# EAGLE board SHTC3 Breakout-Panel (EAGLE 9.5.2), part 1 of 2
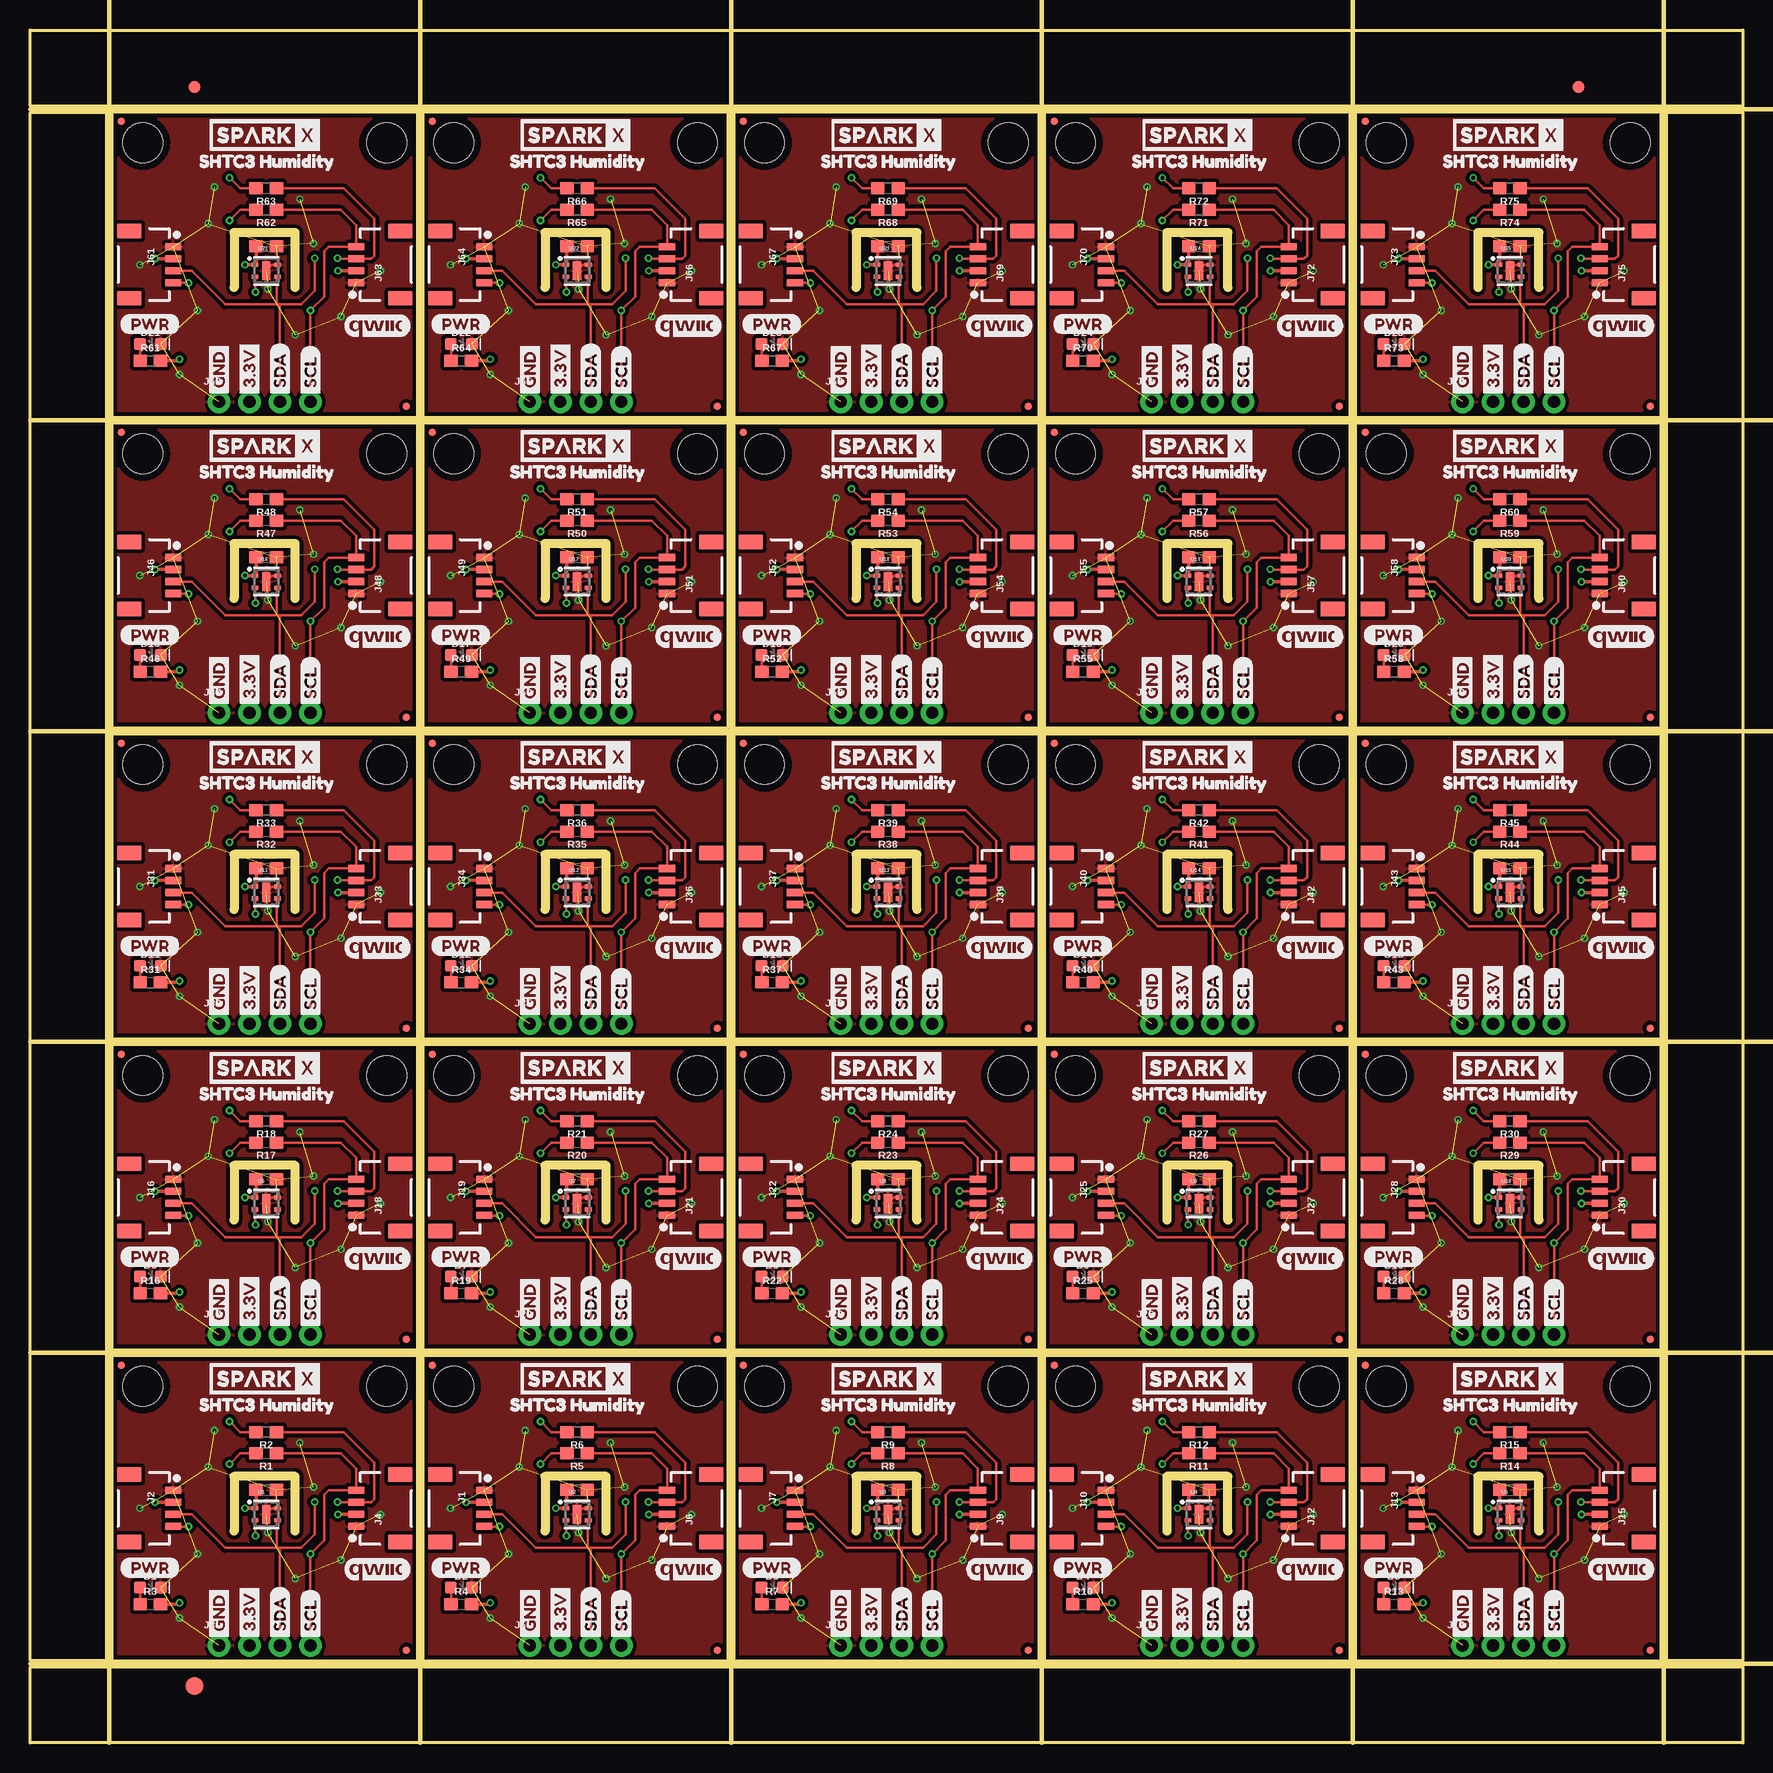
[diagram p0: board, top side]
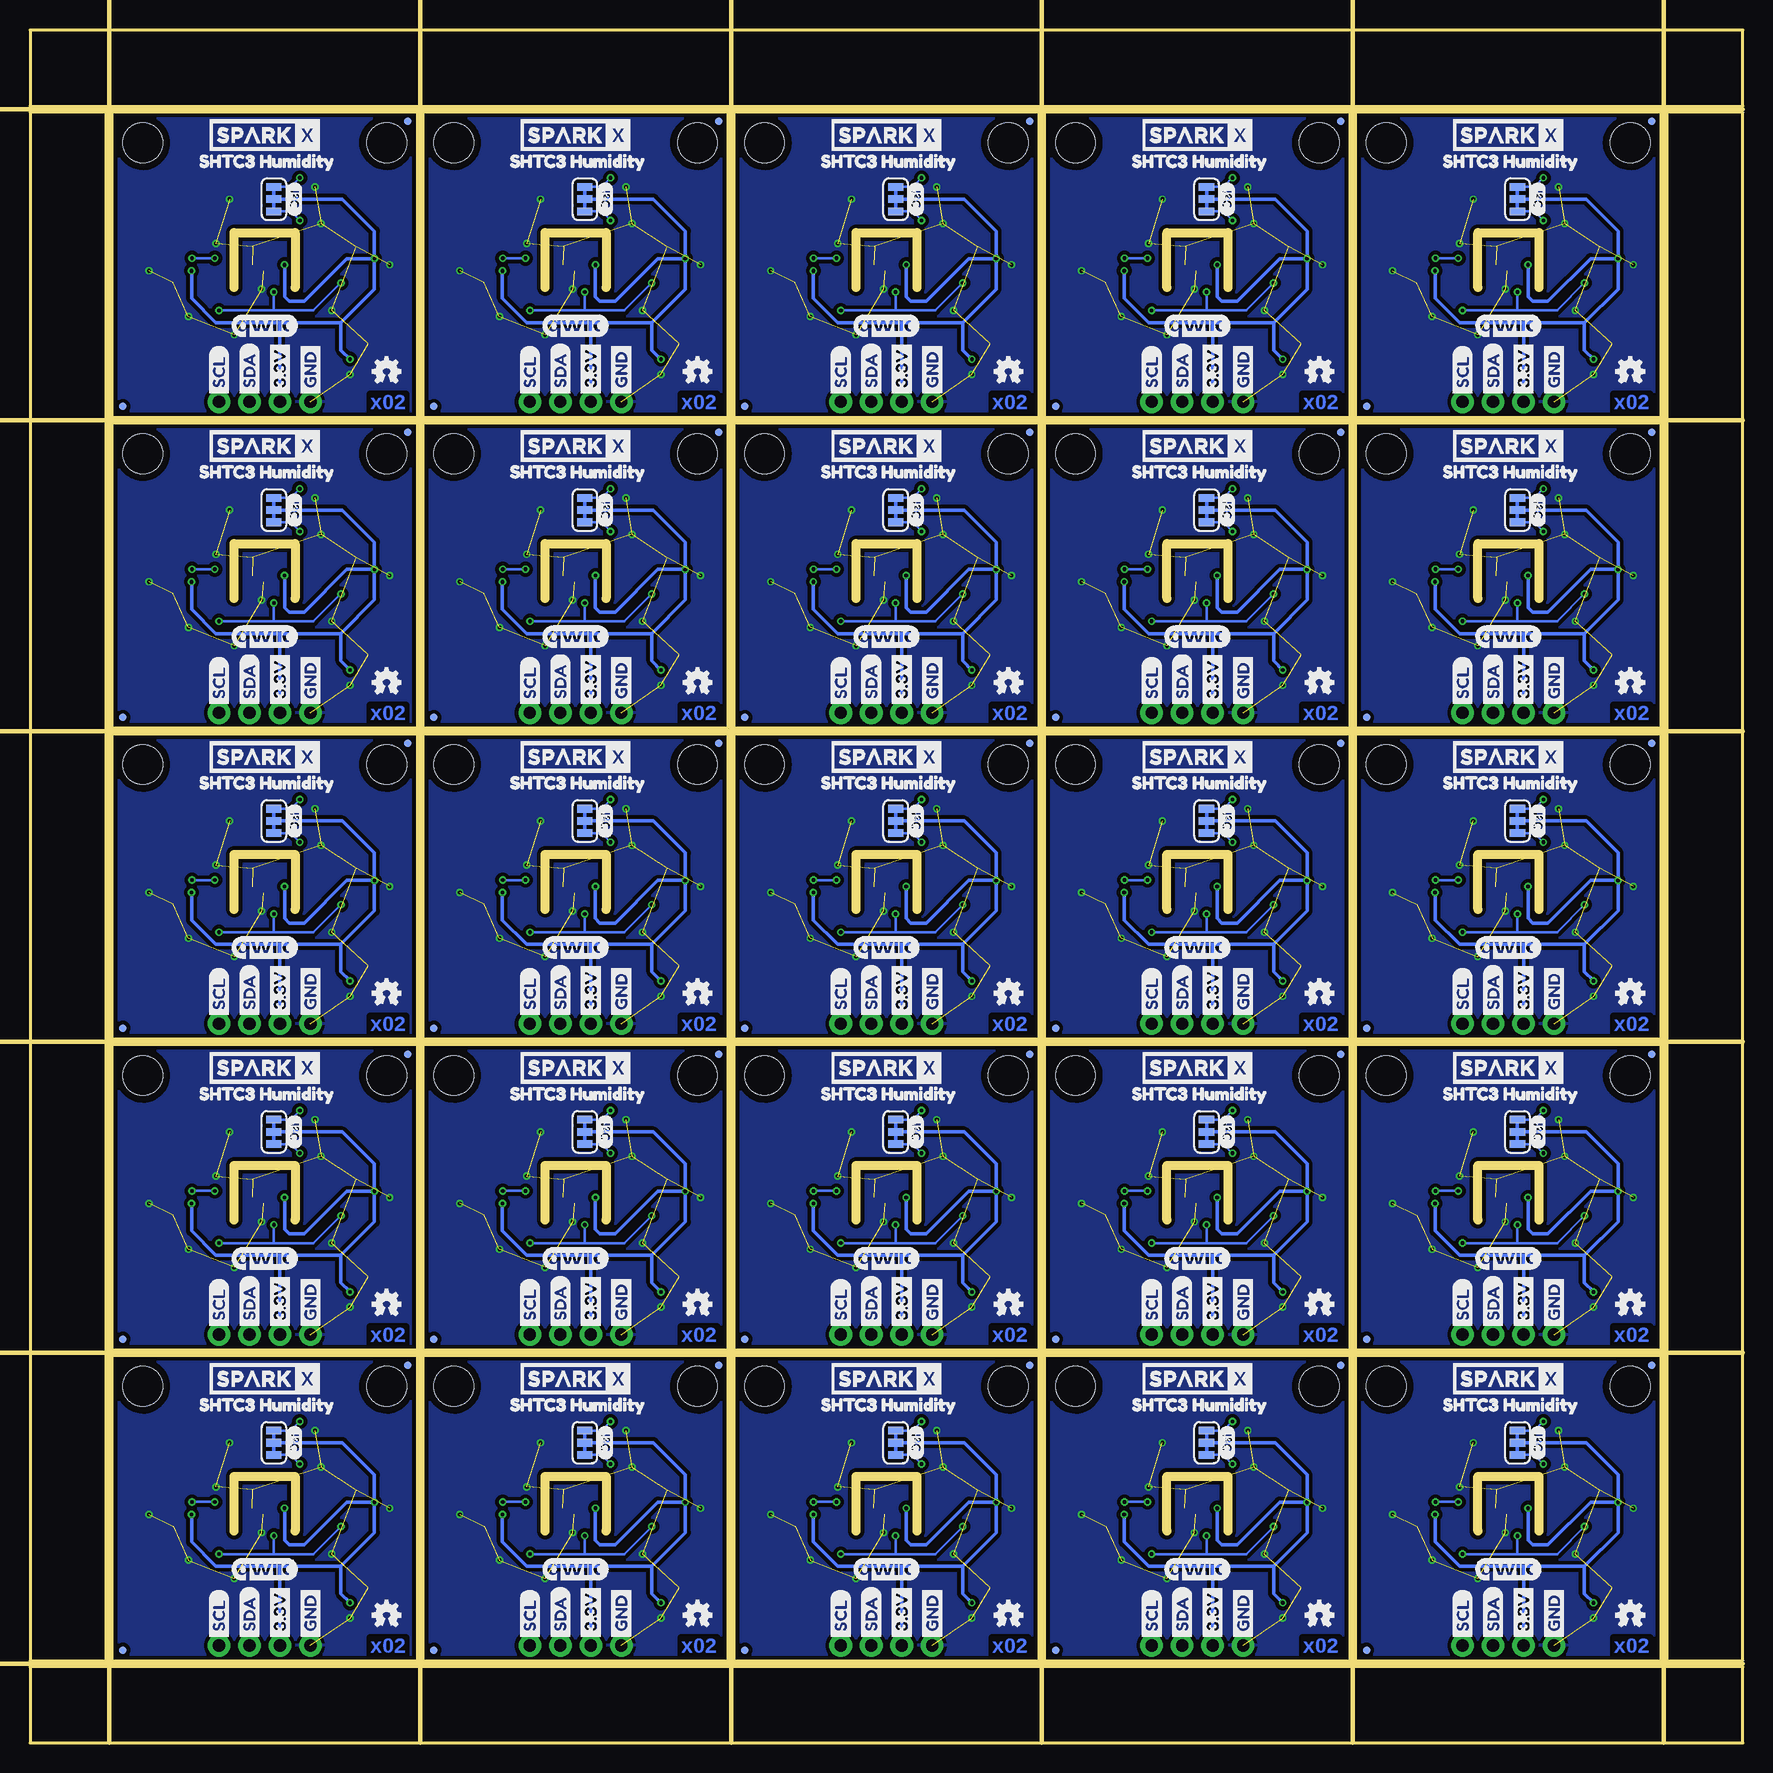
[diagram p1: board, bottom side, seen from below]

Size 142.75 x 142.75 mm. Coordinates in mm from the lower left corner, seen from the top.
Outline: 6.86,6.86 6.86,32.26 32.26,32.26 32.26,6.86 6.86,6.86
Outline: 32.77,6.86 32.77,32.26 58.17,32.26 58.17,6.86 32.77,6.86
Outline: 58.67,6.86 58.67,32.26 84.07,32.26 84.07,6.86 58.67,6.86
Outline: 84.58,6.86 84.58,32.26 109.98,32.26 109.98,6.86 84.58,6.86
Outline: 110.49,6.86 110.49,32.26 135.89,32.26 135.89,6.86 110.49,6.86
Outline: 6.86,32.77 6.86,58.17 32.26,58.17 32.26,32.77 6.86,32.77
Outline: 32.77,32.77 32.77,58.17 58.17,58.17 58.17,32.77 32.77,32.77
Outline: 58.67,32.77 58.67,58.17 84.07,58.17 84.07,32.77 58.67,32.77
Outline: 84.58,32.77 84.58,58.17 109.98,58.17 109.98,32.77 84.58,32.77
Outline: 110.49,32.77 110.49,58.17 135.89,58.17 135.89,32.77 110.49,32.77
Outline: 6.86,58.67 6.86,84.07 32.26,84.07 32.26,58.67 6.86,58.67
Outline: 32.77,58.67 32.77,84.07 58.17,84.07 58.17,58.67 32.77,58.67
Outline: 58.67,58.67 58.67,84.07 84.07,84.07 84.07,58.67 58.67,58.67
Outline: 84.58,58.67 84.58,84.07 109.98,84.07 109.98,58.67 84.58,58.67
Outline: 110.49,58.67 110.49,84.07 135.89,84.07 135.89,58.67 110.49,58.67
Outline: 6.86,84.58 6.86,109.98 32.26,109.98 32.26,84.58 6.86,84.58
Outline: 32.77,84.58 32.77,109.98 58.17,109.98 58.17,84.58 32.77,84.58
Outline: 58.67,84.58 58.67,109.98 84.07,109.98 84.07,84.58 58.67,84.58
Outline: 84.58,84.58 84.58,109.98 109.98,109.98 109.98,84.58 84.58,84.58
Outline: 110.49,84.58 110.49,109.98 135.89,109.98 135.89,84.58 110.49,84.58
Outline: 6.86,110.49 6.86,135.89 32.26,135.89 32.26,110.49 6.86,110.49
Outline: 32.77,110.49 32.77,135.89 58.17,135.89 58.17,110.49 32.77,110.49
Outline: 58.67,110.49 58.67,135.89 84.07,135.89 84.07,110.49 58.67,110.49
Outline: 84.58,110.49 84.58,135.89 109.98,135.89 109.98,110.49 84.58,110.49
Outline: 110.49,110.49 110.49,135.89 135.89,135.89 135.89,110.49 110.49,110.49
Outline: 0,6.35 142.75,6.35 142.75,0 0,0 0,6.35
Outline: 136.4,135.89 142.75,135.89 142.75,6.86 136.4,6.86 136.4,135.89
Outline: 0,142.75 142.75,142.75 142.75,136.4 0,136.4 0,142.75
Outline: 0,135.89 6.35,135.89 6.35,6.86 0,6.86 0,135.89
Copper layers (1*16): Top 0.035mm / dielectric 1.5mm / Bottom 0.035mm
Design rules "SparkFun-2-layer-PCBWay-LIMIT": minimum track width 6mil, minimum drill 0.3mm, track to track 6mil, track to pad 6mil, pad to pad 6mil, via to via 6mil, smd to smd 6mil, copper to edge 6mil, drill to drill 6mil, minimum pad ring 6mil, minimum via ring 6mil, stop-mask expansion 4mil, vias tented up to drill 25mil, thermal gap 10mil
tRestrict: 75 lines
bRestrict: 75 lines
Milling: 87 lines

## Footprints (pad centres in the part's own frame; a part is rotated, then mirrored left to right if it is on the bottom)
0603 = smd 1.1 x 1: 1 -0.85,0; 2 0.85,0
LED-0603 = smd 1 x 1: A -0.877,0; C 0.877,0
FIDUCIAL-1X2 = smd 1 x 1: 1 0,0
FIDUCIAL-1.5X3 = smd 1.5 x 1.5: 1 0,0
1X04_1MM_RA = smd 0.6 x 1.35: 1 -1.5,0; 2 -0.5,0; 3 0.5,0; 4 1.5,0 | smd 1.2 x 2: NC1 2.8,-3.675; NC2 -2.8,-3.675
1X04_NO_SILK = drill 1.016 pad 1.88: 1 0,0; 2 2.54,0; 3 5.08,0; 4 7.62,0
MICRO-FIDUCIAL = smd 0.635 x 0.635: 1 0,0
STAND-OFF = hole 3.302: 0,0
SMT-JUMPER_3_2-NC_TRACE_SILK = smd 0.635 x 1.27: 1 -1.016,0; 2 0,0; 3 1.016,0
SHTC3 = smd 0.55 x 0.35: 1 -0.925,0.5; 2 -0.925,-0.5; 3 0.925,-0.5; 4 0.925,0.5 | smd 0.7 x 1.6: 5 0,0

## Placement (x,y rotation side)
C1  0.1uF  [0603]  19.68,21.08 0 top
C2  0.1uF  [0603]  45.59,21.08 0 top
C3  0.1uF  [0603]  71.5,21.08 0 top
C4  0.1uF  [0603]  97.41,21.08 0 top
C5  0.1uF  [0603]  123.32,21.08 0 top
C6  0.1uF  [0603]  19.68,46.99 0 top
C7  0.1uF  [0603]  45.59,46.99 0 top
C8  0.1uF  [0603]  71.5,46.99 0 top
C9  0.1uF  [0603]  97.41,46.99 0 top
C10  0.1uF  [0603]  123.32,46.99 0 top
C11  0.1uF  [0603]  19.68,72.9 0 top
C12  0.1uF  [0603]  45.59,72.9 0 top
C13  0.1uF  [0603]  71.5,72.9 0 top
C14  0.1uF  [0603]  97.41,72.9 0 top
C15  0.1uF  [0603]  123.32,72.9 0 top
C16  0.1uF  [0603]  19.68,98.81 0 top
C17  0.1uF  [0603]  45.59,98.81 0 top
C18  0.1uF  [0603]  71.5,98.81 0 top
C19  0.1uF  [0603]  97.41,98.81 0 top
C20  0.1uF  [0603]  123.32,98.81 0 top
C21  0.1uF  [0603]  19.68,124.71 0 top
C22  0.1uF  [0603]  45.59,124.71 0 top
C23  0.1uF  [0603]  71.5,124.71 0 top
C24  0.1uF  [0603]  97.41,124.71 0 top
C25  0.1uF  [0603]  123.32,124.71 0 top
D1  RED  [LED-0603]  10.03,12.95 0 top
D2  RED  [LED-0603]  35.94,12.95 0 top
D3  RED  [LED-0603]  61.85,12.95 0 top
D4  RED  [LED-0603]  87.76,12.95 0 top
D5  RED  [LED-0603]  113.67,12.95 0 top
D6  RED  [LED-0603]  10.03,38.86 0 top
D7  RED  [LED-0603]  35.94,38.86 0 top
D8  RED  [LED-0603]  61.85,38.86 0 top
D9  RED  [LED-0603]  87.76,38.86 0 top
D10  RED  [LED-0603]  113.67,38.86 0 top
D11  RED  [LED-0603]  10.03,64.77 0 top
D12  RED  [LED-0603]  35.94,64.77 0 top
D13  RED  [LED-0603]  61.85,64.77 0 top
D14  RED  [LED-0603]  87.76,64.77 0 top
D15  RED  [LED-0603]  113.67,64.77 0 top
D16  RED  [LED-0603]  10.03,90.68 0 top
D17  RED  [LED-0603]  35.94,90.68 0 top
D18  RED  [LED-0603]  61.85,90.68 0 top
D19  RED  [LED-0603]  87.76,90.68 0 top
D20  RED  [LED-0603]  113.67,90.68 0 top
D21  RED  [LED-0603]  10.03,116.59 0 top
D22  RED  [LED-0603]  35.94,116.59 0 top
D23  RED  [LED-0603]  61.85,116.59 0 top
D24  RED  [LED-0603]  87.76,116.59 0 top
D25  RED  [LED-0603]  113.67,116.59 0 top
E$1  [FIDUCIAL-1X2]  13.72,137.99 0 top
E$2  [FIDUCIAL-1X2]  129.03,137.99 0 top
E$3  [FIDUCIAL-1.5X3]  13.72,4.76 0 top
J1  [1X04_1MM_RA]  37.85,19.56 270 top
J2  [1X04_1MM_RA]  11.94,19.56 270 top
J3  PTH  [1X04_NO_SILK]  15.75,8.13 0 top
J4  [1X04_1MM_RA]  27.18,19.56 90 top
J5  PTH  [1X04_NO_SILK]  41.66,8.13 0 top
J6  [1X04_1MM_RA]  53.09,19.56 90 top
J7  [1X04_1MM_RA]  63.75,19.56 270 top
J8  PTH  [1X04_NO_SILK]  67.56,8.13 0 top
J9  [1X04_1MM_RA]  78.99,19.56 90 top
J10  [1X04_1MM_RA]  89.66,19.56 270 top
J11  PTH  [1X04_NO_SILK]  93.47,8.13 0 top
J12  [1X04_1MM_RA]  104.9,19.56 90 top
J13  [1X04_1MM_RA]  115.57,19.56 270 top
J14  PTH  [1X04_NO_SILK]  119.38,8.13 0 top
J15  [1X04_1MM_RA]  130.81,19.56 90 top
J16  [1X04_1MM_RA]  11.94,45.47 270 top
J17  PTH  [1X04_NO_SILK]  15.75,34.04 0 top
J18  [1X04_1MM_RA]  27.18,45.47 90 top
J19  [1X04_1MM_RA]  37.85,45.47 270 top
J20  PTH  [1X04_NO_SILK]  41.66,34.04 0 top
J21  [1X04_1MM_RA]  53.09,45.47 90 top
J22  [1X04_1MM_RA]  63.75,45.47 270 top
J23  PTH  [1X04_NO_SILK]  67.56,34.04 0 top
J24  [1X04_1MM_RA]  78.99,45.47 90 top
J25  [1X04_1MM_RA]  89.66,45.47 270 top
J26  PTH  [1X04_NO_SILK]  93.47,34.04 0 top
J27  [1X04_1MM_RA]  104.9,45.47 90 top
J28  [1X04_1MM_RA]  115.57,45.47 270 top
J29  PTH  [1X04_NO_SILK]  119.38,34.04 0 top
J30  [1X04_1MM_RA]  130.81,45.47 90 top
J31  [1X04_1MM_RA]  11.94,71.37 270 top
J32  PTH  [1X04_NO_SILK]  15.75,59.94 0 top
J33  [1X04_1MM_RA]  27.18,71.37 90 top
J34  [1X04_1MM_RA]  37.85,71.37 270 top
J35  PTH  [1X04_NO_SILK]  41.66,59.94 0 top
J36  [1X04_1MM_RA]  53.09,71.37 90 top
J37  [1X04_1MM_RA]  63.75,71.37 270 top
J38  PTH  [1X04_NO_SILK]  67.56,59.94 0 top
J39  [1X04_1MM_RA]  78.99,71.37 90 top
J40  [1X04_1MM_RA]  89.66,71.37 270 top
J41  PTH  [1X04_NO_SILK]  93.47,59.94 0 top
J42  [1X04_1MM_RA]  104.9,71.37 90 top
J43  [1X04_1MM_RA]  115.57,71.37 270 top
J44  PTH  [1X04_NO_SILK]  119.38,59.94 0 top
J45  [1X04_1MM_RA]  130.81,71.37 90 top
J46  [1X04_1MM_RA]  11.94,97.28 270 top
J47  PTH  [1X04_NO_SILK]  15.75,85.85 0 top
J48  [1X04_1MM_RA]  27.18,97.28 90 top
J49  [1X04_1MM_RA]  37.85,97.28 270 top
J50  PTH  [1X04_NO_SILK]  41.66,85.85 0 top
J51  [1X04_1MM_RA]  53.09,97.28 90 top
J52  [1X04_1MM_RA]  63.75,97.28 270 top
J53  PTH  [1X04_NO_SILK]  67.56,85.85 0 top
J54  [1X04_1MM_RA]  78.99,97.28 90 top
J55  [1X04_1MM_RA]  89.66,97.28 270 top
J56  PTH  [1X04_NO_SILK]  93.47,85.85 0 top
J57  [1X04_1MM_RA]  104.9,97.28 90 top
J58  [1X04_1MM_RA]  115.57,97.28 270 top
J59  PTH  [1X04_NO_SILK]  119.38,85.85 0 top
J60  [1X04_1MM_RA]  130.81,97.28 90 top
J61  [1X04_1MM_RA]  11.94,123.19 270 top
J62  PTH  [1X04_NO_SILK]  15.75,111.76 0 top
J63  [1X04_1MM_RA]  27.18,123.19 90 top
J64  [1X04_1MM_RA]  37.85,123.19 270 top
J65  PTH  [1X04_NO_SILK]  41.66,111.76 0 top
J66  [1X04_1MM_RA]  53.09,123.19 90 top
J67  [1X04_1MM_RA]  63.75,123.19 270 top
J68  PTH  [1X04_NO_SILK]  67.56,111.76 0 top
J69  [1X04_1MM_RA]  78.99,123.19 90 top
J70  [1X04_1MM_RA]  89.66,123.19 270 top
J71  PTH  [1X04_NO_SILK]  93.47,111.76 0 top
J72  [1X04_1MM_RA]  104.9,123.19 90 top
J73  [1X04_1MM_RA]  115.57,123.19 270 top
J74  PTH  [1X04_NO_SILK]  119.38,111.76 0 top
J75  [1X04_1MM_RA]  130.81,123.19 90 top
JP1  FIDUCIALUFIDUCIAL  [MICRO-FIDUCIAL]  7.62,31.5 0 bottom
JP2  FIDUCIALUFIDUCIAL  [MICRO-FIDUCIAL]  31.37,7.75 0 top
JP3  STAND-OFF  [STAND-OFF]  9.4,29.72 0 top
JP4  STAND-OFF  [STAND-OFF]  29.72,29.72 0 top
JP5  FIDUCIALUFIDUCIAL  [MICRO-FIDUCIAL]  31.37,7.75 0 bottom
JP6  FIDUCIALUFIDUCIAL  [MICRO-FIDUCIAL]  7.62,31.5 0 top
JP7  JUMPER-SMT_3_2-NC_TRACE_SILK  [SMT-JUMPER_3_2-NC_TRACE_SILK]  18.8,25.02 270 bottom
JP8  STAND-OFF  [STAND-OFF]  35.31,29.72 0 top
JP9  STAND-OFF  [STAND-OFF]  55.63,29.72 0 top
JP10  FIDUCIALUFIDUCIAL  [MICRO-FIDUCIAL]  57.28,7.75 0 top
JP11  FIDUCIALUFIDUCIAL  [MICRO-FIDUCIAL]  33.53,31.5 0 top
JP12  FIDUCIALUFIDUCIAL  [MICRO-FIDUCIAL]  33.53,31.5 0 bottom
JP13  FIDUCIALUFIDUCIAL  [MICRO-FIDUCIAL]  57.28,7.75 0 bottom
JP14  JUMPER-SMT_3_2-NC_TRACE_SILK  [SMT-JUMPER_3_2-NC_TRACE_SILK]  44.7,25.02 270 bottom
JP15  STAND-OFF  [STAND-OFF]  61.21,29.72 0 top
JP16  STAND-OFF  [STAND-OFF]  81.53,29.72 0 top
JP17  FIDUCIALUFIDUCIAL  [MICRO-FIDUCIAL]  83.19,7.75 0 top
JP18  FIDUCIALUFIDUCIAL  [MICRO-FIDUCIAL]  59.44,31.5 0 top
JP19  FIDUCIALUFIDUCIAL  [MICRO-FIDUCIAL]  59.44,31.5 0 bottom
JP20  FIDUCIALUFIDUCIAL  [MICRO-FIDUCIAL]  83.19,7.75 0 bottom
JP21  JUMPER-SMT_3_2-NC_TRACE_SILK  [SMT-JUMPER_3_2-NC_TRACE_SILK]  70.61,25.02 270 bottom
JP22  STAND-OFF  [STAND-OFF]  87.12,29.72 0 top
JP23  STAND-OFF  [STAND-OFF]  107.44,29.72 0 top
JP24  FIDUCIALUFIDUCIAL  [MICRO-FIDUCIAL]  109.09,7.75 0 top
JP25  FIDUCIALUFIDUCIAL  [MICRO-FIDUCIAL]  85.34,31.5 0 top
JP26  FIDUCIALUFIDUCIAL  [MICRO-FIDUCIAL]  85.34,31.5 0 bottom
JP27  FIDUCIALUFIDUCIAL  [MICRO-FIDUCIAL]  109.09,7.75 0 bottom
JP28  JUMPER-SMT_3_2-NC_TRACE_SILK  [SMT-JUMPER_3_2-NC_TRACE_SILK]  96.52,25.02 270 bottom
JP29  STAND-OFF  [STAND-OFF]  113.03,29.72 0 top
JP30  STAND-OFF  [STAND-OFF]  133.35,29.72 0 top
JP31  FIDUCIALUFIDUCIAL  [MICRO-FIDUCIAL]  135,7.75 0 top
JP32  FIDUCIALUFIDUCIAL  [MICRO-FIDUCIAL]  111.25,31.5 0 top
JP33  FIDUCIALUFIDUCIAL  [MICRO-FIDUCIAL]  111.25,31.5 0 bottom
JP34  FIDUCIALUFIDUCIAL  [MICRO-FIDUCIAL]  135,7.75 0 bottom
JP35  JUMPER-SMT_3_2-NC_TRACE_SILK  [SMT-JUMPER_3_2-NC_TRACE_SILK]  122.43,25.02 270 bottom
JP36  STAND-OFF  [STAND-OFF]  9.4,55.63 0 top
JP37  STAND-OFF  [STAND-OFF]  29.72,55.63 0 top
JP38  FIDUCIALUFIDUCIAL  [MICRO-FIDUCIAL]  31.37,33.66 0 top
JP39  FIDUCIALUFIDUCIAL  [MICRO-FIDUCIAL]  7.62,57.4 0 top
JP40  FIDUCIALUFIDUCIAL  [MICRO-FIDUCIAL]  7.62,57.4 0 bottom
JP41  FIDUCIALUFIDUCIAL  [MICRO-FIDUCIAL]  31.37,33.66 0 bottom
JP42  JUMPER-SMT_3_2-NC_TRACE_SILK  [SMT-JUMPER_3_2-NC_TRACE_SILK]  18.8,50.93 270 bottom
JP43  STAND-OFF  [STAND-OFF]  35.31,55.63 0 top
JP44  STAND-OFF  [STAND-OFF]  55.63,55.63 0 top
JP45  FIDUCIALUFIDUCIAL  [MICRO-FIDUCIAL]  57.28,33.66 0 top
JP46  FIDUCIALUFIDUCIAL  [MICRO-FIDUCIAL]  33.53,57.4 0 top
JP47  FIDUCIALUFIDUCIAL  [MICRO-FIDUCIAL]  33.53,57.4 0 bottom
JP48  FIDUCIALUFIDUCIAL  [MICRO-FIDUCIAL]  57.28,33.66 0 bottom
JP49  JUMPER-SMT_3_2-NC_TRACE_SILK  [SMT-JUMPER_3_2-NC_TRACE_SILK]  44.7,50.93 270 bottom
JP50  STAND-OFF  [STAND-OFF]  61.21,55.63 0 top
JP51  STAND-OFF  [STAND-OFF]  81.53,55.63 0 top
JP52  FIDUCIALUFIDUCIAL  [MICRO-FIDUCIAL]  83.19,33.66 0 top
JP53  FIDUCIALUFIDUCIAL  [MICRO-FIDUCIAL]  59.44,57.4 0 top
JP54  FIDUCIALUFIDUCIAL  [MICRO-FIDUCIAL]  59.44,57.4 0 bottom
JP55  FIDUCIALUFIDUCIAL  [MICRO-FIDUCIAL]  83.19,33.66 0 bottom
JP56  JUMPER-SMT_3_2-NC_TRACE_SILK  [SMT-JUMPER_3_2-NC_TRACE_SILK]  70.61,50.93 270 bottom
JP57  STAND-OFF  [STAND-OFF]  87.12,55.63 0 top
JP58  STAND-OFF  [STAND-OFF]  107.44,55.63 0 top
JP59  FIDUCIALUFIDUCIAL  [MICRO-FIDUCIAL]  109.09,33.66 0 top
JP60  FIDUCIALUFIDUCIAL  [MICRO-FIDUCIAL]  85.34,57.4 0 top
JP61  FIDUCIALUFIDUCIAL  [MICRO-FIDUCIAL]  85.34,57.4 0 bottom
JP62  FIDUCIALUFIDUCIAL  [MICRO-FIDUCIAL]  109.09,33.66 0 bottom
JP63  JUMPER-SMT_3_2-NC_TRACE_SILK  [SMT-JUMPER_3_2-NC_TRACE_SILK]  96.52,50.93 270 bottom
JP64  STAND-OFF  [STAND-OFF]  113.03,55.63 0 top
JP65  STAND-OFF  [STAND-OFF]  133.35,55.63 0 top
JP66  FIDUCIALUFIDUCIAL  [MICRO-FIDUCIAL]  135,33.66 0 top
JP67  FIDUCIALUFIDUCIAL  [MICRO-FIDUCIAL]  111.25,57.4 0 top
JP68  FIDUCIALUFIDUCIAL  [MICRO-FIDUCIAL]  111.25,57.4 0 bottom
JP69  FIDUCIALUFIDUCIAL  [MICRO-FIDUCIAL]  135,33.66 0 bottom
JP70  JUMPER-SMT_3_2-NC_TRACE_SILK  [SMT-JUMPER_3_2-NC_TRACE_SILK]  122.43,50.93 270 bottom
JP71  STAND-OFF  [STAND-OFF]  9.4,81.53 0 top
JP72  STAND-OFF  [STAND-OFF]  29.72,81.53 0 top
JP73  FIDUCIALUFIDUCIAL  [MICRO-FIDUCIAL]  31.37,59.56 0 top
JP74  FIDUCIALUFIDUCIAL  [MICRO-FIDUCIAL]  7.62,83.31 0 top
JP75  FIDUCIALUFIDUCIAL  [MICRO-FIDUCIAL]  7.62,83.31 0 bottom
JP76  FIDUCIALUFIDUCIAL  [MICRO-FIDUCIAL]  31.37,59.56 0 bottom
JP77  JUMPER-SMT_3_2-NC_TRACE_SILK  [SMT-JUMPER_3_2-NC_TRACE_SILK]  18.8,76.84 270 bottom
JP78  STAND-OFF  [STAND-OFF]  35.31,81.53 0 top
JP79  STAND-OFF  [STAND-OFF]  55.63,81.53 0 top
JP80  FIDUCIALUFIDUCIAL  [MICRO-FIDUCIAL]  57.28,59.56 0 top
JP81  FIDUCIALUFIDUCIAL  [MICRO-FIDUCIAL]  33.53,83.31 0 top
JP82  FIDUCIALUFIDUCIAL  [MICRO-FIDUCIAL]  33.53,83.31 0 bottom
JP83  FIDUCIALUFIDUCIAL  [MICRO-FIDUCIAL]  57.28,59.56 0 bottom
JP84  JUMPER-SMT_3_2-NC_TRACE_SILK  [SMT-JUMPER_3_2-NC_TRACE_SILK]  44.7,76.84 270 bottom
JP85  STAND-OFF  [STAND-OFF]  61.21,81.53 0 top
JP86  STAND-OFF  [STAND-OFF]  81.53,81.53 0 top
JP87  FIDUCIALUFIDUCIAL  [MICRO-FIDUCIAL]  83.19,59.56 0 top
JP88  FIDUCIALUFIDUCIAL  [MICRO-FIDUCIAL]  59.44,83.31 0 top
JP89  FIDUCIALUFIDUCIAL  [MICRO-FIDUCIAL]  59.44,83.31 0 bottom
JP90  FIDUCIALUFIDUCIAL  [MICRO-FIDUCIAL]  83.19,59.56 0 bottom
JP91  JUMPER-SMT_3_2-NC_TRACE_SILK  [SMT-JUMPER_3_2-NC_TRACE_SILK]  70.61,76.84 270 bottom
JP92  STAND-OFF  [STAND-OFF]  87.12,81.53 0 top
JP93  STAND-OFF  [STAND-OFF]  107.44,81.53 0 top
JP94  FIDUCIALUFIDUCIAL  [MICRO-FIDUCIAL]  109.09,59.56 0 top
JP95  FIDUCIALUFIDUCIAL  [MICRO-FIDUCIAL]  85.34,83.31 0 top
JP96  FIDUCIALUFIDUCIAL  [MICRO-FIDUCIAL]  85.34,83.31 0 bottom
JP97  FIDUCIALUFIDUCIAL  [MICRO-FIDUCIAL]  109.09,59.56 0 bottom
JP98  JUMPER-SMT_3_2-NC_TRACE_SILK  [SMT-JUMPER_3_2-NC_TRACE_SILK]  96.52,76.84 270 bottom
JP99  STAND-OFF  [STAND-OFF]  113.03,81.53 0 top
JP100  STAND-OFF  [STAND-OFF]  133.35,81.53 0 top
JP101  FIDUCIALUFIDUCIAL  [MICRO-FIDUCIAL]  135,59.56 0 top
JP102  FIDUCIALUFIDUCIAL  [MICRO-FIDUCIAL]  111.25,83.31 0 top
JP103  FIDUCIALUFIDUCIAL  [MICRO-FIDUCIAL]  111.25,83.31 0 bottom
JP104  FIDUCIALUFIDUCIAL  [MICRO-FIDUCIAL]  135,59.56 0 bottom
JP105  JUMPER-SMT_3_2-NC_TRACE_SILK  [SMT-JUMPER_3_2-NC_TRACE_SILK]  122.43,76.84 270 bottom
JP106  STAND-OFF  [STAND-OFF]  9.4,107.44 0 top
JP107  STAND-OFF  [STAND-OFF]  29.72,107.44 0 top
JP108  FIDUCIALUFIDUCIAL  [MICRO-FIDUCIAL]  31.37,85.47 0 top
JP109  FIDUCIALUFIDUCIAL  [MICRO-FIDUCIAL]  7.62,109.22 0 top
JP110  FIDUCIALUFIDUCIAL  [MICRO-FIDUCIAL]  7.62,109.22 0 bottom
JP111  FIDUCIALUFIDUCIAL  [MICRO-FIDUCIAL]  31.37,85.47 0 bottom
JP112  JUMPER-SMT_3_2-NC_TRACE_SILK  [SMT-JUMPER_3_2-NC_TRACE_SILK]  18.8,102.74 270 bottom
JP113  STAND-OFF  [STAND-OFF]  35.31,107.44 0 top
JP114  STAND-OFF  [STAND-OFF]  55.63,107.44 0 top
JP115  FIDUCIALUFIDUCIAL  [MICRO-FIDUCIAL]  57.28,85.47 0 top
JP116  FIDUCIALUFIDUCIAL  [MICRO-FIDUCIAL]  33.53,109.22 0 top
JP117  FIDUCIALUFIDUCIAL  [MICRO-FIDUCIAL]  33.53,109.22 0 bottom
JP118  FIDUCIALUFIDUCIAL  [MICRO-FIDUCIAL]  57.28,85.47 0 bottom
JP119  JUMPER-SMT_3_2-NC_TRACE_SILK  [SMT-JUMPER_3_2-NC_TRACE_SILK]  44.7,102.74 270 bottom
JP120  STAND-OFF  [STAND-OFF]  61.21,107.44 0 top
JP121  STAND-OFF  [STAND-OFF]  81.53,107.44 0 top
JP122  FIDUCIALUFIDUCIAL  [MICRO-FIDUCIAL]  83.19,85.47 0 top
JP123  FIDUCIALUFIDUCIAL  [MICRO-FIDUCIAL]  59.44,109.22 0 top
JP124  FIDUCIALUFIDUCIAL  [MICRO-FIDUCIAL]  59.44,109.22 0 bottom
JP125  FIDUCIALUFIDUCIAL  [MICRO-FIDUCIAL]  83.19,85.47 0 bottom
JP126  JUMPER-SMT_3_2-NC_TRACE_SILK  [SMT-JUMPER_3_2-NC_TRACE_SILK]  70.61,102.74 270 bottom
JP127  STAND-OFF  [STAND-OFF]  87.12,107.44 0 top
JP128  STAND-OFF  [STAND-OFF]  107.44,107.44 0 top
JP129  FIDUCIALUFIDUCIAL  [MICRO-FIDUCIAL]  109.09,85.47 0 top
JP130  FIDUCIALUFIDUCIAL  [MICRO-FIDUCIAL]  85.34,109.22 0 top
JP131  FIDUCIALUFIDUCIAL  [MICRO-FIDUCIAL]  85.34,109.22 0 bottom
JP132  FIDUCIALUFIDUCIAL  [MICRO-FIDUCIAL]  109.09,85.47 0 bottom
JP133  JUMPER-SMT_3_2-NC_TRACE_SILK  [SMT-JUMPER_3_2-NC_TRACE_SILK]  96.52,102.74 270 bottom
JP134  STAND-OFF  [STAND-OFF]  113.03,107.44 0 top
JP135  STAND-OFF  [STAND-OFF]  133.35,107.44 0 top
JP136  FIDUCIALUFIDUCIAL  [MICRO-FIDUCIAL]  135,85.47 0 top
JP137  FIDUCIALUFIDUCIAL  [MICRO-FIDUCIAL]  111.25,109.22 0 top
JP138  FIDUCIALUFIDUCIAL  [MICRO-FIDUCIAL]  111.25,109.22 0 bottom
JP139  FIDUCIALUFIDUCIAL  [MICRO-FIDUCIAL]  135,85.47 0 bottom
JP140  JUMPER-SMT_3_2-NC_TRACE_SILK  [SMT-JUMPER_3_2-NC_TRACE_SILK]  122.43,102.74 270 bottom
JP141  STAND-OFF  [STAND-OFF]  9.4,133.35 0 top
JP142  STAND-OFF  [STAND-OFF]  29.72,133.35 0 top
JP143  FIDUCIALUFIDUCIAL  [MICRO-FIDUCIAL]  31.37,111.38 0 top
JP144  FIDUCIALUFIDUCIAL  [MICRO-FIDUCIAL]  7.62,135.13 0 top
JP145  FIDUCIALUFIDUCIAL  [MICRO-FIDUCIAL]  7.62,135.13 0 bottom
JP146  FIDUCIALUFIDUCIAL  [MICRO-FIDUCIAL]  31.37,111.38 0 bottom
JP147  JUMPER-SMT_3_2-NC_TRACE_SILK  [SMT-JUMPER_3_2-NC_TRACE_SILK]  18.8,128.65 270 bottom
JP148  STAND-OFF  [STAND-OFF]  35.31,133.35 0 top
JP149  STAND-OFF  [STAND-OFF]  55.63,133.35 0 top
JP150  FIDUCIALUFIDUCIAL  [MICRO-FIDUCIAL]  57.28,111.38 0 top
JP151  FIDUCIALUFIDUCIAL  [MICRO-FIDUCIAL]  33.53,135.13 0 top
JP152  FIDUCIALUFIDUCIAL  [MICRO-FIDUCIAL]  33.53,135.13 0 bottom
JP153  FIDUCIALUFIDUCIAL  [MICRO-FIDUCIAL]  57.28,111.38 0 bottom
JP154  JUMPER-SMT_3_2-NC_TRACE_SILK  [SMT-JUMPER_3_2-NC_TRACE_SILK]  44.7,128.65 270 bottom
JP155  STAND-OFF  [STAND-OFF]  61.21,133.35 0 top
JP156  STAND-OFF  [STAND-OFF]  81.53,133.35 0 top
JP157  FIDUCIALUFIDUCIAL  [MICRO-FIDUCIAL]  83.19,111.38 0 top
JP158  FIDUCIALUFIDUCIAL  [MICRO-FIDUCIAL]  59.44,135.13 0 top
JP159  FIDUCIALUFIDUCIAL  [MICRO-FIDUCIAL]  59.44,135.13 0 bottom
JP160  FIDUCIALUFIDUCIAL  [MICRO-FIDUCIAL]  83.19,111.38 0 bottom
JP161  JUMPER-SMT_3_2-NC_TRACE_SILK  [SMT-JUMPER_3_2-NC_TRACE_SILK]  70.61,128.65 270 bottom
JP162  STAND-OFF  [STAND-OFF]  87.12,133.35 0 top
JP163  STAND-OFF  [STAND-OFF]  107.44,133.35 0 top
JP164  FIDUCIALUFIDUCIAL  [MICRO-FIDUCIAL]  109.09,111.38 0 top
JP165  FIDUCIALUFIDUCIAL  [MICRO-FIDUCIAL]  85.34,135.13 0 top
JP166  FIDUCIALUFIDUCIAL  [MICRO-FIDUCIAL]  85.34,135.13 0 bottom
JP167  FIDUCIALUFIDUCIAL  [MICRO-FIDUCIAL]  109.09,111.38 0 bottom
JP168  JUMPER-SMT_3_2-NC_TRACE_SILK  [SMT-JUMPER_3_2-NC_TRACE_SILK]  96.52,128.65 270 bottom
JP169  STAND-OFF  [STAND-OFF]  113.03,133.35 0 top
JP170  STAND-OFF  [STAND-OFF]  133.35,133.35 0 top
JP171  FIDUCIALUFIDUCIAL  [MICRO-FIDUCIAL]  135,111.38 0 top
JP172  FIDUCIALUFIDUCIAL  [MICRO-FIDUCIAL]  111.25,135.13 0 top
JP173  FIDUCIALUFIDUCIAL  [MICRO-FIDUCIAL]  111.25,135.13 0 bottom
JP174  FIDUCIALUFIDUCIAL  [MICRO-FIDUCIAL]  135,111.38 0 bottom
JP175  JUMPER-SMT_3_2-NC_TRACE_SILK  [SMT-JUMPER_3_2-NC_TRACE_SILK]  122.43,128.65 270 bottom
LOGO1  OSHW-LOGOMINI  [OSHW-LOGO-MINI]  9.4,10.67 0 bottom
LOGO2  OSHW-LOGOMINI  [OSHW-LOGO-MINI]  35.31,10.67 0 bottom
LOGO3  OSHW-LOGOMINI  [OSHW-LOGO-MINI]  61.21,10.67 0 bottom
LOGO4  OSHW-LOGOMINI  [OSHW-LOGO-MINI]  87.12,10.67 0 bottom
LOGO5  OSHW-LOGOMINI  [OSHW-LOGO-MINI]  113.03,10.67 0 bottom
LOGO6  OSHW-LOGOMINI  [OSHW-LOGO-MINI]  9.4,36.58 0 bottom
LOGO7  OSHW-LOGOMINI  [OSHW-LOGO-MINI]  35.31,36.58 0 bottom
LOGO8  OSHW-LOGOMINI  [OSHW-LOGO-MINI]  61.21,36.58 0 bottom
LOGO9  OSHW-LOGOMINI  [OSHW-LOGO-MINI]  87.12,36.58 0 bottom
LOGO10  OSHW-LOGOMINI  [OSHW-LOGO-MINI]  113.03,36.58 0 bottom
LOGO11  OSHW-LOGOMINI  [OSHW-LOGO-MINI]  9.4,62.48 0 bottom
LOGO12  OSHW-LOGOMINI  [OSHW-LOGO-MINI]  35.31,62.48 0 bottom
LOGO13  OSHW-LOGOMINI  [OSHW-LOGO-MINI]  61.21,62.48 0 bottom
LOGO14  OSHW-LOGOMINI  [OSHW-LOGO-MINI]  87.12,62.48 0 bottom
LOGO15  OSHW-LOGOMINI  [OSHW-LOGO-MINI]  113.03,62.48 0 bottom
LOGO16  OSHW-LOGOMINI  [OSHW-LOGO-MINI]  9.4,88.39 0 bottom
LOGO17  OSHW-LOGOMINI  [OSHW-LOGO-MINI]  35.31,88.39 0 bottom
LOGO18  OSHW-LOGOMINI  [OSHW-LOGO-MINI]  61.21,88.39 0 bottom
LOGO19  OSHW-LOGOMINI  [OSHW-LOGO-MINI]  87.12,88.39 0 bottom
LOGO20  OSHW-LOGOMINI  [OSHW-LOGO-MINI]  113.03,88.39 0 bottom
LOGO21  OSHW-LOGOMINI  [OSHW-LOGO-MINI]  9.4,114.3 0 bottom
LOGO22  OSHW-LOGOMINI  [OSHW-LOGO-MINI]  35.31,114.3 0 bottom
LOGO23  OSHW-LOGOMINI  [OSHW-LOGO-MINI]  61.21,114.3 0 bottom
LOGO24  OSHW-LOGOMINI  [OSHW-LOGO-MINI]  87.12,114.3 0 bottom
LOGO25  OSHW-LOGOMINI  [OSHW-LOGO-MINI]  113.03,114.3 0 bottom
R1  2.2k  [0603]  19.68,24.13 180 top
R2  2.2k  [0603]  19.68,25.91 180 top
R3  1k  [0603]  10.03,11.56 0 top
R4  1k  [0603]  35.94,11.56 0 top
R5  2.2k  [0603]  45.59,24.13 180 top
R6  2.2k  [0603]  45.59,25.91 180 top
R7  1k  [0603]  61.85,11.56 0 top
R8  2.2k  [0603]  71.5,24.13 180 top
R9  2.2k  [0603]  71.5,25.91 180 top
R10  1k  [0603]  87.76,11.56 0 top
R11  2.2k  [0603]  97.41,24.13 180 top
R12  2.2k  [0603]  97.41,25.91 180 top
R13  1k  [0603]  113.67,11.56 0 top
R14  2.2k  [0603]  123.32,24.13 180 top
R15  2.2k  [0603]  123.32,25.91 180 top
R16  1k  [0603]  10.03,37.46 0 top
R17  2.2k  [0603]  19.68,50.04 180 top
R18  2.2k  [0603]  19.68,51.82 180 top
R19  1k  [0603]  35.94,37.46 0 top
R20  2.2k  [0603]  45.59,50.04 180 top
R21  2.2k  [0603]  45.59,51.82 180 top
R22  1k  [0603]  61.85,37.46 0 top
R23  2.2k  [0603]  71.5,50.04 180 top
R24  2.2k  [0603]  71.5,51.82 180 top
R25  1k  [0603]  87.76,37.46 0 top
R26  2.2k  [0603]  97.41,50.04 180 top
R27  2.2k  [0603]  97.41,51.82 180 top
R28  1k  [0603]  113.67,37.46 0 top
R29  2.2k  [0603]  123.32,50.04 180 top
R30  2.2k  [0603]  123.32,51.82 180 top
R31  1k  [0603]  10.03,63.37 0 top
R32  2.2k  [0603]  19.68,75.95 180 top
R33  2.2k  [0603]  19.68,77.72 180 top
R34  1k  [0603]  35.94,63.37 0 top
R35  2.2k  [0603]  45.59,75.95 180 top
R36  2.2k  [0603]  45.59,77.72 180 top
R37  1k  [0603]  61.85,63.37 0 top
R38  2.2k  [0603]  71.5,75.95 180 top
R39  2.2k  [0603]  71.5,77.72 180 top
R40  1k  [0603]  87.76,63.37 0 top
R41  2.2k  [0603]  97.41,75.95 180 top
R42  2.2k  [0603]  97.41,77.72 180 top
R43  1k  [0603]  113.67,63.37 0 top
R44  2.2k  [0603]  123.32,75.95 180 top
R45  2.2k  [0603]  123.32,77.72 180 top
R46  1k  [0603]  10.03,89.28 0 top
R47  2.2k  [0603]  19.68,101.85 180 top
R48  2.2k  [0603]  19.68,103.63 180 top
R49  1k  [0603]  35.94,89.28 0 top
R50  2.2k  [0603]  45.59,101.85 180 top
R51  2.2k  [0603]  45.59,103.63 180 top
R52  1k  [0603]  61.85,89.28 0 top
R53  2.2k  [0603]  71.5,101.85 180 top
R54  2.2k  [0603]  71.5,103.63 180 top
R55  1k  [0603]  87.76,89.28 0 top
R56  2.2k  [0603]  97.41,101.85 180 top
R57  2.2k  [0603]  97.41,103.63 180 top
R58  1k  [0603]  113.67,89.28 0 top
R59  2.2k  [0603]  123.32,101.85 180 top
R60  2.2k  [0603]  123.32,103.63 180 top
R61  1k  [0603]  10.03,115.19 0 top
R62  2.2k  [0603]  19.68,127.76 180 top
R63  2.2k  [0603]  19.68,129.54 180 top
R64  1k  [0603]  35.94,115.19 0 top
R65  2.2k  [0603]  45.59,127.76 180 top
R66  2.2k  [0603]  45.59,129.54 180 top
R67  1k  [0603]  61.85,115.19 0 top
R68  2.2k  [0603]  71.5,127.76 180 top
R69  2.2k  [0603]  71.5,129.54 180 top
R70  1k  [0603]  87.76,115.19 0 top
R71  2.2k  [0603]  97.41,127.76 180 top
R72  2.2k  [0603]  97.41,129.54 180 top
R73  1k  [0603]  113.67,115.19 0 top
R74  2.2k  [0603]  123.32,127.76 180 top
R75  2.2k  [0603]  123.32,129.54 180 top
U1  SHTC3  [SHTC3]  19.68,19.05 0 top
U2  SHTC3  [SHTC3]  45.59,19.05 0 top
U3  SHTC3  [SHTC3]  71.5,19.05 0 top
U4  SHTC3  [SHTC3]  97.41,19.05 0 top
U5  SHTC3  [SHTC3]  123.32,19.05 0 top
U6  SHTC3  [SHTC3]  19.68,44.96 0 top
U7  SHTC3  [SHTC3]  45.59,44.96 0 top
U8  SHTC3  [SHTC3]  71.5,44.96 0 top
U9  SHTC3  [SHTC3]  97.41,44.96 0 top
U10  SHTC3  [SHTC3]  123.32,44.96 0 top
U11  SHTC3  [SHTC3]  19.68,70.87 0 top
U12  SHTC3  [SHTC3]  45.59,70.87 0 top
U13  SHTC3  [SHTC3]  71.5,70.87 0 top
U14  SHTC3  [SHTC3]  97.41,70.87 0 top
U15  SHTC3  [SHTC3]  123.32,70.87 0 top
U16  SHTC3  [SHTC3]  19.68,96.77 0 top
U17  SHTC3  [SHTC3]  45.59,96.77 0 top
U18  SHTC3  [SHTC3]  71.5,96.77 0 top
U19  SHTC3  [SHTC3]  97.41,96.77 0 top
U20  SHTC3  [SHTC3]  123.32,96.77 0 top
U21  SHTC3  [SHTC3]  19.68,122.68 0 top
U22  SHTC3  [SHTC3]  45.59,122.68 0 top
U23  SHTC3  [SHTC3]  71.5,122.68 0 top
U24  SHTC3  [SHTC3]  97.41,122.68 0 top
U25  SHTC3  [SHTC3]  123.32,122.68 0 top
U$1  SPARKX-LOGO4  [SPARKX-MEDIUM]  19.56,30.35 0 top
U$2  SPARKX-LOGO4  [SPARKX-MEDIUM]  19.56,30.35 0 bottom
U$3  [GND1]  15.75,8.38 90 bottom
U$4  [3#3V2]  18.29,8.38 90 bottom
U$5  [SDA8]  20.83,8.38 90 bottom
U$6  [SCL9]  23.37,8.38 90 bottom
U$7  [SHTC3_HUMIDITY1]  25.91,28.19 0 bottom
U$8  [SHTC3_HUMIDITY1]  13.21,28.19 0 top
U$9  [I_SUPER2_C-()-03]  17.07,26.44 270 bottom
U$10  [(PWR)]  7.49,14.61 0 top
U$11  [QWIIC_5.5MM]  28.96,14.48 0 top
U$12  [QWIIC_5.5MM]  19.56,14.48 0 bottom
U$13  SPARKX-LOGO4  [SPARKX-MEDIUM]  45.47,30.35 0 bottom
U$14  SPARKX-LOGO4  [SPARKX-MEDIUM]  45.47,30.35 0 top
U$15  [3#3V2]  44.2,8.38 90 top
U$16  [GND1]  41.66,8.38 90 top
U$17  [SCL9]  49.28,8.38 90 top
U$18  [SDA8]  46.74,8.38 90 top
U$19  [GND1]  41.66,8.38 90 bottom
U$20  [3#3V2]  44.2,8.38 90 bottom
U$21  [3#3V2]  18.29,8.38 90 top
U$22  [GND1]  15.75,8.38 90 top
U$23  [SDA8]  46.74,8.38 90 bottom
U$24  [SCL9]  49.28,8.38 90 bottom
U$25  [(PWR)]  33.4,14.61 0 top
U$26  [SCL9]  23.37,8.38 90 top
U$27  [SDA8]  20.83,8.38 90 top
U$28  [SHTC3_HUMIDITY1]  51.82,28.19 0 bottom
U$29  [SHTC3_HUMIDITY1]  39.12,28.19 0 top
U$30  [I_SUPER2_C-()-03]  42.98,26.44 270 bottom
U$31  [QWIIC_5.5MM]  54.86,14.48 0 top
U$32  [QWIIC_5.5MM]  45.47,14.48 0 bottom
U$33  SPARKX-LOGO4  [SPARKX-MEDIUM]  71.37,30.35 0 bottom
U$34  SPARKX-LOGO4  [SPARKX-MEDIUM]  71.37,30.35 0 top
U$35  [3#3V2]  70.1,8.38 90 top
U$36  [GND1]  67.56,8.38 90 top
U$37  [SCL9]  75.18,8.38 90 top
U$38  [SDA8]  72.64,8.38 90 top
U$39  [GND1]  67.56,8.38 90 bottom
U$40  [3#3V2]  70.1,8.38 90 bottom
U$41  [SDA8]  72.64,8.38 90 bottom
U$42  [SCL9]  75.18,8.38 90 bottom
U$43  [(PWR)]  59.31,14.61 0 top
U$44  [SHTC3_HUMIDITY1]  77.72,28.19 0 bottom
U$45  [SHTC3_HUMIDITY1]  65.02,28.19 0 top
U$46  [I_SUPER2_C-()-03]  68.88,26.44 270 bottom
U$47  [QWIIC_5.5MM]  80.77,14.48 0 top
U$48  [QWIIC_5.5MM]  71.37,14.48 0 bottom
U$49  SPARKX-LOGO4  [SPARKX-MEDIUM]  97.28,30.35 0 bottom
U$50  SPARKX-LOGO4  [SPARKX-MEDIUM]  97.28,30.35 0 top
U$51  [3#3V2]  96.01,8.38 90 top
U$52  [GND1]  93.47,8.38 90 top
U$53  [SCL9]  101.09,8.38 90 top
U$54  [SDA8]  98.55,8.38 90 top
U$55  [GND1]  93.47,8.38 90 bottom
U$56  [3#3V2]  96.01,8.38 90 bottom
U$57  [SDA8]  98.55,8.38 90 bottom
U$58  [SCL9]  101.09,8.38 90 bottom
U$59  [(PWR)]  85.22,14.61 0 top
U$60  [SHTC3_HUMIDITY1]  103.63,28.19 0 bottom
U$61  [SHTC3_HUMIDITY1]  90.93,28.19 0 top
U$62  [I_SUPER2_C-()-03]  94.79,26.44 270 bottom
U$63  [QWIIC_5.5MM]  106.68,14.48 0 top
U$64  [QWIIC_5.5MM]  97.28,14.48 0 bottom
U$65  SPARKX-LOGO4  [SPARKX-MEDIUM]  123.19,30.35 0 bottom
U$66  SPARKX-LOGO4  [SPARKX-MEDIUM]  123.19,30.35 0 top
U$67  [3#3V2]  121.92,8.38 90 top
U$68  [GND1]  119.38,8.38 90 top
U$69  [SCL9]  127,8.38 90 top
U$70  [SDA8]  124.46,8.38 90 top
U$71  [GND1]  119.38,8.38 90 bottom
U$72  [3#3V2]  121.92,8.38 90 bottom
U$73  [SDA8]  124.46,8.38 90 bottom
U$74  [SCL9]  127,8.38 90 bottom
U$75  [(PWR)]  111.12,14.61 0 top
U$76  [SHTC3_HUMIDITY1]  129.54,28.19 0 bottom
U$77  [SHTC3_HUMIDITY1]  116.84,28.19 0 top
U$78  [I_SUPER2_C-()-03]  120.7,26.44 270 bottom
U$79  [QWIIC_5.5MM]  132.59,14.48 0 top
U$80  [QWIIC_5.5MM]  123.19,14.48 0 bottom
U$81  SPARKX-LOGO4  [SPARKX-MEDIUM]  19.56,56.26 0 bottom
U$82  SPARKX-LOGO4  [SPARKX-MEDIUM]  19.56,56.26 0 top
U$83  [3#3V2]  18.29,34.29 90 top
U$84  [GND1]  15.75,34.29 90 top
U$85  [SCL9]  23.37,34.29 90 top
U$86  [SDA8]  20.83,34.29 90 top
U$87  [GND1]  15.75,34.29 90 bottom
U$88  [3#3V2]  18.29,34.29 90 bottom
U$89  [SDA8]  20.83,34.29 90 bottom
U$90  [SCL9]  23.37,34.29 90 bottom
U$91  [(PWR)]  7.49,40.51 0 top
U$92  [SHTC3_HUMIDITY1]  25.91,54.1 0 bottom
U$93  [SHTC3_HUMIDITY1]  13.21,54.1 0 top
U$94  [I_SUPER2_C-()-03]  17.07,52.35 270 bottom
U$95  [QWIIC_5.5MM]  28.96,40.39 0 top
U$96  [QWIIC_5.5MM]  19.56,40.39 0 bottom
U$97  SPARKX-LOGO4  [SPARKX-MEDIUM]  45.47,56.26 0 bottom
U$98  SPARKX-LOGO4  [SPARKX-MEDIUM]  45.47,56.26 0 top
U$99  [3#3V2]  44.2,34.29 90 top
U$100  [GND1]  41.66,34.29 90 top
U$101  [SCL9]  49.28,34.29 90 top
U$102  [SDA8]  46.74,34.29 90 top
U$103  [GND1]  41.66,34.29 90 bottom
U$104  [3#3V2]  44.2,34.29 90 bottom
U$105  [SDA8]  46.74,34.29 90 bottom
U$106  [SCL9]  49.28,34.29 90 bottom
U$107  [(PWR)]  33.4,40.51 0 top
U$108  [SHTC3_HUMIDITY1]  51.82,54.1 0 bottom
U$109  [SHTC3_HUMIDITY1]  39.12,54.1 0 top
U$110  [I_SUPER2_C-()-03]  42.98,52.35 270 bottom
U$111  [QWIIC_5.5MM]  54.86,40.39 0 top
U$112  [QWIIC_5.5MM]  45.47,40.39 0 bottom
U$113  SPARKX-LOGO4  [SPARKX-MEDIUM]  71.37,56.26 0 bottom
U$114  SPARKX-LOGO4  [SPARKX-MEDIUM]  71.37,56.26 0 top
U$115  [3#3V2]  70.1,34.29 90 top
U$116  [GND1]  67.56,34.29 90 top
U$117  [SCL9]  75.18,34.29 90 top
U$118  [SDA8]  72.64,34.29 90 top
U$119  [GND1]  67.56,34.29 90 bottom
U$120  [3#3V2]  70.1,34.29 90 bottom
U$121  [SDA8]  72.64,34.29 90 bottom
U$122  [SCL9]  75.18,34.29 90 bottom
U$123  [(PWR)]  59.31,40.51 0 top
U$124  [SHTC3_HUMIDITY1]  77.72,54.1 0 bottom
U$125  [SHTC3_HUMIDITY1]  65.02,54.1 0 top
U$126  [I_SUPER2_C-()-03]  68.88,52.35 270 bottom
U$127  [QWIIC_5.5MM]  80.77,40.39 0 top
U$128  [QWIIC_5.5MM]  71.37,40.39 0 bottom
U$129  SPARKX-LOGO4  [SPARKX-MEDIUM]  97.28,56.26 0 bottom
U$130  SPARKX-LOGO4  [SPARKX-MEDIUM]  97.28,56.26 0 top
U$131  [3#3V2]  96.01,34.29 90 top
U$132  [GND1]  93.47,34.29 90 top
U$133  [SCL9]  101.09,34.29 90 top
U$134  [SDA8]  98.55,34.29 90 top
U$135  [GND1]  93.47,34.29 90 bottom
U$136  [3#3V2]  96.01,34.29 90 bottom
U$137  [SDA8]  98.55,34.29 90 bottom
U$138  [SCL9]  101.09,34.29 90 bottom
U$139  [(PWR)]  85.22,40.51 0 top
U$140  [SHTC3_HUMIDITY1]  103.63,54.1 0 bottom
U$141  [SHTC3_HUMIDITY1]  90.93,54.1 0 top
U$142  [I_SUPER2_C-()-03]  94.79,52.35 270 bottom
U$143  [QWIIC_5.5MM]  106.68,40.39 0 top
U$144  [QWIIC_5.5MM]  97.28,40.39 0 bottom
U$145  SPARKX-LOGO4  [SPARKX-MEDIUM]  123.19,56.26 0 bottom
U$146  SPARKX-LOGO4  [SPARKX-MEDIUM]  123.19,56.26 0 top
U$147  [3#3V2]  121.92,34.29 90 top
U$148  [GND1]  119.38,34.29 90 top
U$149  [SCL9]  127,34.29 90 top
U$150  [SDA8]  124.46,34.29 90 top
U$151  [GND1]  119.38,34.29 90 bottom
U$152  [3#3V2]  121.92,34.29 90 bottom
U$153  [SDA8]  124.46,34.29 90 bottom
U$154  [SCL9]  127,34.29 90 bottom
U$155  [(PWR)]  111.12,40.51 0 top
U$156  [SHTC3_HUMIDITY1]  129.54,54.1 0 bottom
U$157  [SHTC3_HUMIDITY1]  116.84,54.1 0 top
U$158  [I_SUPER2_C-()-03]  120.7,52.35 270 bottom
U$159  [QWIIC_5.5MM]  132.59,40.39 0 top
U$160  [QWIIC_5.5MM]  123.19,40.39 0 bottom
U$161  SPARKX-LOGO4  [SPARKX-MEDIUM]  19.56,82.17 0 bottom
U$162  SPARKX-LOGO4  [SPARKX-MEDIUM]  19.56,82.17 0 top
U$163  [3#3V2]  18.29,60.2 90 top
U$164  [GND1]  15.75,60.2 90 top
U$165  [SCL9]  23.37,60.2 90 top
U$166  [SDA8]  20.83,60.2 90 top
U$167  [GND1]  15.75,60.2 90 bottom
U$168  [3#3V2]  18.29,60.2 90 bottom
U$169  [SDA8]  20.83,60.2 90 bottom
U$170  [SCL9]  23.37,60.2 90 bottom
U$171  [(PWR)]  7.49,66.42 0 top
U$172  [SHTC3_HUMIDITY1]  25.91,80.01 0 bottom
U$173  [SHTC3_HUMIDITY1]  13.21,80.01 0 top
U$174  [I_SUPER2_C-()-03]  17.07,78.26 270 bottom
U$175  [QWIIC_5.5MM]  28.96,66.29 0 top
U$176  [QWIIC_5.5MM]  19.56,66.29 0 bottom
U$177  SPARKX-LOGO4  [SPARKX-MEDIUM]  45.47,82.17 0 bottom
U$178  SPARKX-LOGO4  [SPARKX-MEDIUM]  45.47,82.17 0 top
U$179  [3#3V2]  44.2,60.2 90 top
U$180  [GND1]  41.66,60.2 90 top
U$181  [SCL9]  49.28,60.2 90 top
U$182  [SDA8]  46.74,60.2 90 top
U$183  [GND1]  41.66,60.2 90 bottom
U$184  [3#3V2]  44.2,60.2 90 bottom
U$185  [SDA8]  46.74,60.2 90 bottom
U$186  [SCL9]  49.28,60.2 90 bottom
U$187  [(PWR)]  33.4,66.42 0 top
U$188  [SHTC3_HUMIDITY1]  51.82,80.01 0 bottom
U$189  [SHTC3_HUMIDITY1]  39.12,80.01 0 top
U$190  [I_SUPER2_C-()-03]  42.98,78.26 270 bottom
U$191  [QWIIC_5.5MM]  54.86,66.29 0 top
U$192  [QWIIC_5.5MM]  45.47,66.29 0 bottom
U$193  SPARKX-LOGO4  [SPARKX-MEDIUM]  71.37,82.17 0 bottom
U$194  SPARKX-LOGO4  [SPARKX-MEDIUM]  71.37,82.17 0 top
U$195  [3#3V2]  70.1,60.2 90 top
U$196  [GND1]  67.56,60.2 90 top
U$197  [SCL9]  75.18,60.2 90 top
U$198  [SDA8]  72.64,60.2 90 top
U$199  [GND1]  67.56,60.2 90 bottom
U$200  [3#3V2]  70.1,60.2 90 bottom
U$201  [SDA8]  72.64,60.2 90 bottom
U$202  [SCL9]  75.18,60.2 90 bottom
U$203  [(PWR)]  59.31,66.42 0 top
U$204  [SHTC3_HUMIDITY1]  77.72,80.01 0 bottom
U$205  [SHTC3_HUMIDITY1]  65.02,80.01 0 top
U$206  [I_SUPER2_C-()-03]  68.88,78.26 270 bottom
U$207  [QWIIC_5.5MM]  80.77,66.29 0 top
U$208  [QWIIC_5.5MM]  71.37,66.29 0 bottom
U$209  SPARKX-LOGO4  [SPARKX-MEDIUM]  97.28,82.17 0 bottom
U$210  SPARKX-LOGO4  [SPARKX-MEDIUM]  97.28,82.17 0 top
U$211  [3#3V2]  96.01,60.2 90 top
U$212  [GND1]  93.47,60.2 90 top
U$213  [SCL9]  101.09,60.2 90 top
U$214  [SDA8]  98.55,60.2 90 top
U$215  [GND1]  93.47,60.2 90 bottom
U$216  [3#3V2]  96.01,60.2 90 bottom
U$217  [SDA8]  98.55,60.2 90 bottom
U$218  [SCL9]  101.09,60.2 90 bottom
U$219  [(PWR)]  85.22,66.42 0 top
U$220  [SHTC3_HUMIDITY1]  103.63,80.01 0 bottom
U$221  [SHTC3_HUMIDITY1]  90.93,80.01 0 top
U$222  [I_SUPER2_C-()-03]  94.79,78.26 270 bottom
U$223  [QWIIC_5.5MM]  106.68,66.29 0 top
U$224  [QWIIC_5.5MM]  97.28,66.29 0 bottom
U$225  SPARKX-LOGO4  [SPARKX-MEDIUM]  123.19,82.17 0 bottom
U$226  SPARKX-LOGO4  [SPARKX-MEDIUM]  123.19,82.17 0 top
U$227  [3#3V2]  121.92,60.2 90 top
U$228  [GND1]  119.38,60.2 90 top
U$229  [SCL9]  127,60.2 90 top
U$230  [SDA8]  124.46,60.2 90 top
U$231  [GND1]  119.38,60.2 90 bottom
U$232  [3#3V2]  121.92,60.2 90 bottom
U$233  [SDA8]  124.46,60.2 90 bottom
U$234  [SCL9]  127,60.2 90 bottom
U$235  [(PWR)]  111.12,66.42 0 top
U$236  [SHTC3_HUMIDITY1]  129.54,80.01 0 bottom
U$237  [SHTC3_HUMIDITY1]  116.84,80.01 0 top
U$238  [I_SUPER2_C-()-03]  120.7,78.26 270 bottom
U$239  [QWIIC_5.5MM]  132.59,66.29 0 top
U$240  [QWIIC_5.5MM]  123.19,66.29 0 bottom
U$241  SPARKX-LOGO4  [SPARKX-MEDIUM]  19.56,108.08 0 bottom
U$242  SPARKX-LOGO4  [SPARKX-MEDIUM]  19.56,108.08 0 top
U$243  [3#3V2]  18.29,86.11 90 top
U$244  [GND1]  15.75,86.11 90 top
U$245  [SCL9]  23.37,86.11 90 top
U$246  [SDA8]  20.83,86.11 90 top
U$247  [GND1]  15.75,86.11 90 bottom
U$248  [3#3V2]  18.29,86.11 90 bottom
U$249  [SDA8]  20.83,86.11 90 bottom
U$250  [SCL9]  23.37,86.11 90 bottom
U$251  [(PWR)]  7.49,92.33 0 top
U$252  [SHTC3_HUMIDITY1]  25.91,105.92 0 bottom
U$253  [SHTC3_HUMIDITY1]  13.21,105.92 0 top
U$254  [I_SUPER2_C-()-03]  17.07,104.17 270 bottom
U$255  [QWIIC_5.5MM]  28.96,92.2 0 top
U$256  [QWIIC_5.5MM]  19.56,92.2 0 bottom
U$257  SPARKX-LOGO4  [SPARKX-MEDIUM]  45.47,108.08 0 bottom
U$258  SPARKX-LOGO4  [SPARKX-MEDIUM]  45.47,108.08 0 top
U$259  [3#3V2]  44.2,86.11 90 top
U$260  [GND1]  41.66,86.11 90 top
U$261  [SCL9]  49.28,86.11 90 top
U$262  [SDA8]  46.74,86.11 90 top
U$263  [GND1]  41.66,86.11 90 bottom
U$264  [3#3V2]  44.2,86.11 90 bottom
U$265  [SDA8]  46.74,86.11 90 bottom
U$266  [SCL9]  49.28,86.11 90 bottom
U$267  [(PWR)]  33.4,92.33 0 top
U$268  [SHTC3_HUMIDITY1]  51.82,105.92 0 bottom
U$269  [SHTC3_HUMIDITY1]  39.12,105.92 0 top
U$270  [I_SUPER2_C-()-03]  42.98,104.17 270 bottom
U$271  [QWIIC_5.5MM]  54.86,92.2 0 top
U$272  [QWIIC_5.5MM]  45.47,92.2 0 bottom
U$273  SPARKX-LOGO4  [SPARKX-MEDIUM]  71.37,108.08 0 bottom
U$274  SPARKX-LOGO4  [SPARKX-MEDIUM]  71.37,108.08 0 top
U$275  [3#3V2]  70.1,86.11 90 top
U$276  [GND1]  67.56,86.11 90 top
U$277  [SCL9]  75.18,86.11 90 top
U$278  [SDA8]  72.64,86.11 90 top
U$279  [GND1]  67.56,86.11 90 bottom
U$280  [3#3V2]  70.1,86.11 90 bottom
U$281  [SDA8]  72.64,86.11 90 bottom
U$282  [SCL9]  75.18,86.11 90 bottom
U$283  [(PWR)]  59.31,92.33 0 top
U$284  [SHTC3_HUMIDITY1]  77.72,105.92 0 bottom
U$285  [SHTC3_HUMIDITY1]  65.02,105.92 0 top
U$286  [I_SUPER2_C-()-03]  68.88,104.17 270 bottom
U$287  [QWIIC_5.5MM]  80.77,92.2 0 top
U$288  [QWIIC_5.5MM]  71.37,92.2 0 bottom
U$289  SPARKX-LOGO4  [SPARKX-MEDIUM]  97.28,108.08 0 bottom
U$290  SPARKX-LOGO4  [SPARKX-MEDIUM]  97.28,108.08 0 top
U$291  [3#3V2]  96.01,86.11 90 top
U$292  [GND1]  93.47,86.11 90 top
U$293  [SCL9]  101.09,86.11 90 top
U$294  [SDA8]  98.55,86.11 90 top
U$295  [GND1]  93.47,86.11 90 bottom
U$296  [3#3V2]  96.01,86.11 90 bottom
U$297  [SDA8]  98.55,86.11 90 bottom
U$298  [SCL9]  101.09,86.11 90 bottom
U$299  [(PWR)]  85.22,92.33 0 top
U$300  [SHTC3_HUMIDITY1]  103.63,105.92 0 bottom
U$301  [SHTC3_HUMIDITY1]  90.93,105.92 0 top
U$302  [I_SUPER2_C-()-03]  94.79,104.17 270 bottom
U$303  [QWIIC_5.5MM]  106.68,92.2 0 top
U$304  [QWIIC_5.5MM]  97.28,92.2 0 bottom
U$305  SPARKX-LOGO4  [SPARKX-MEDIUM]  123.19,108.08 0 bottom
U$306  SPARKX-LOGO4  [SPARKX-MEDIUM]  123.19,108.08 0 top
U$307  [3#3V2]  121.92,86.11 90 top
U$308  [GND1]  119.38,86.11 90 top
U$309  [SCL9]  127,86.11 90 top
U$310  [SDA8]  124.46,86.11 90 top
U$311  [GND1]  119.38,86.11 90 bottom
U$312  [3#3V2]  121.92,86.11 90 bottom
U$313  [SDA8]  124.46,86.11 90 bottom
U$314  [SCL9]  127,86.11 90 bottom
U$315  [(PWR)]  111.12,92.33 0 top
U$316  [SHTC3_HUMIDITY1]  129.54,105.92 0 bottom
U$317  [SHTC3_HUMIDITY1]  116.84,105.92 0 top
U$318  [I_SUPER2_C-()-03]  120.7,104.17 270 bottom
U$319  [QWIIC_5.5MM]  132.59,92.2 0 top
U$320  [QWIIC_5.5MM]  123.19,92.2 0 bottom
U$321  SPARKX-LOGO4  [SPARKX-MEDIUM]  19.56,133.98 0 bottom
U$322  SPARKX-LOGO4  [SPARKX-MEDIUM]  19.56,133.98 0 top
U$323  [3#3V2]  18.29,112.01 90 top
U$324  [GND1]  15.75,112.01 90 top
U$325  [SCL9]  23.37,112.01 90 top
U$326  [SDA8]  20.83,112.01 90 top
U$327  [GND1]  15.75,112.01 90 bottom
U$328  [3#3V2]  18.29,112.01 90 bottom
U$329  [SDA8]  20.83,112.01 90 bottom
U$330  [SCL9]  23.37,112.01 90 bottom
U$331  [(PWR)]  7.49,118.24 0 top
U$332  [SHTC3_HUMIDITY1]  25.91,131.83 0 bottom
U$333  [SHTC3_HUMIDITY1]  13.21,131.83 0 top
U$334  [I_SUPER2_C-()-03]  17.07,130.07 270 bottom
U$335  [QWIIC_5.5MM]  28.96,118.11 0 top
U$336  [QWIIC_5.5MM]  19.56,118.11 0 bottom
U$337  SPARKX-LOGO4  [SPARKX-MEDIUM]  45.47,133.98 0 bottom
U$338  SPARKX-LOGO4  [SPARKX-MEDIUM]  45.47,133.98 0 top
U$339  [3#3V2]  44.2,112.01 90 top
U$340  [GND1]  41.66,112.01 90 top
U$341  [SCL9]  49.28,112.01 90 top
U$342  [SDA8]  46.74,112.01 90 top
U$343  [GND1]  41.66,112.01 90 bottom
U$344  [3#3V2]  44.2,112.01 90 bottom
U$345  [SDA8]  46.74,112.01 90 bottom
U$346  [SCL9]  49.28,112.01 90 bottom
U$347  [(PWR)]  33.4,118.24 0 top
U$348  [SHTC3_HUMIDITY1]  51.82,131.83 0 bottom
U$349  [SHTC3_HUMIDITY1]  39.12,131.83 0 top
U$350  [I_SUPER2_C-()-03]  42.98,130.07 270 bottom
U$351  [QWIIC_5.5MM]  54.86,118.11 0 top
U$352  [QWIIC_5.5MM]  45.47,118.11 0 bottom
U$353  SPARKX-LOGO4  [SPARKX-MEDIUM]  71.37,133.98 0 bottom
U$354  SPARKX-LOGO4  [SPARKX-MEDIUM]  71.37,133.98 0 top
U$355  [3#3V2]  70.1,112.01 90 top
U$356  [GND1]  67.56,112.01 90 top
U$357  [SCL9]  75.18,112.01 90 top
U$358  [SDA8]  72.64,112.01 90 top
U$359  [GND1]  67.56,112.01 90 bottom
U$360  [3#3V2]  70.1,112.01 90 bottom
U$361  [SDA8]  72.64,112.01 90 bottom
U$362  [SCL9]  75.18,112.01 90 bottom
U$363  [(PWR)]  59.31,118.24 0 top
U$364  [SHTC3_HUMIDITY1]  77.72,131.83 0 bottom
U$365  [SHTC3_HUMIDITY1]  65.02,131.83 0 top
U$366  [I_SUPER2_C-()-03]  68.88,130.07 270 bottom
U$367  [QWIIC_5.5MM]  80.77,118.11 0 top
U$368  [QWIIC_5.5MM]  71.37,118.11 0 bottom
U$369  SPARKX-LOGO4  [SPARKX-MEDIUM]  97.28,133.98 0 bottom
U$370  SPARKX-LOGO4  [SPARKX-MEDIUM]  97.28,133.98 0 top
U$371  [3#3V2]  96.01,112.01 90 top
U$372  [GND1]  93.47,112.01 90 top
U$373  [SCL9]  101.09,112.01 90 top
U$374  [SDA8]  98.55,112.01 90 top
U$375  [GND1]  93.47,112.01 90 bottom
U$376  [3#3V2]  96.01,112.01 90 bottom
U$377  [SDA8]  98.55,112.01 90 bottom
U$378  [SCL9]  101.09,112.01 90 bottom
U$379  [(PWR)]  85.22,118.24 0 top
U$380  [SHTC3_HUMIDITY1]  103.63,131.83 0 bottom
U$381  [SHTC3_HUMIDITY1]  90.93,131.83 0 top
U$382  [I_SUPER2_C-()-03]  94.79,130.07 270 bottom
U$383  [QWIIC_5.5MM]  106.68,118.11 0 top
U$384  [QWIIC_5.5MM]  97.28,118.11 0 bottom
U$385  SPARKX-LOGO4  [SPARKX-MEDIUM]  123.19,133.98 0 bottom
U$386  SPARKX-LOGO4  [SPARKX-MEDIUM]  123.19,133.98 0 top
U$387  [3#3V2]  121.92,112.01 90 top
U$388  [GND1]  119.38,112.01 90 top
U$389  [SCL9]  127,112.01 90 top
U$390  [SDA8]  124.46,112.01 90 top
U$391  [GND1]  119.38,112.01 90 bottom
U$392  [3#3V2]  121.92,112.01 90 bottom
U$393  [SDA8]  124.46,112.01 90 bottom
U$394  [SCL9]  127,112.01 90 bottom
U$395  [(PWR)]  111.12,118.24 0 top
U$396  [SHTC3_HUMIDITY1]  129.54,131.83 0 bottom
U$397  [SHTC3_HUMIDITY1]  116.84,131.83 0 top
U$398  [I_SUPER2_C-()-03]  120.7,130.07 270 bottom
U$399  [QWIIC_5.5MM]  132.59,118.11 0 top
U$400  [QWIIC_5.5MM]  123.19,118.11 0 bottom

## Library data of the parts
C1-C25 = SparkFun-Capacitors; PROD_ID: CAP-00810
D1-D25 = SparkFun-LED; PROD_ID: DIO-00819
E$1 E$2 LOGO1-LOGO25 U$11 U$12 U$31 U$32 U$47 U$48 U$63 U$64 U$79 U$80 U$95 U$96 U$111 U$112 U$127 U$128 U$143 U$144 U$159 U$160 U$175 U$176 U$191 U$192 U$207 U$208 U$223 U$224 U$239 U$240 U$255 U$256 U$271 U$272 U$287 U$288 U$303 U$304 U$319 U$320 U$335 U$336 U$351 U$352 U$367 U$368 U$383 U$384 U$399 U$400 = SparkFun-Aesthetics
E$3 = SparkFun-Retired
J1 J2 J4 J6 J7 J9 J10 J12 J13 J15 J16 J18 J19 J21 J22 J24 J25 J27 J28 J30 J31 J33 J34 J36 J37 J39 J40 J42 J43 J45 J46 J48 J49 J51 J52 J54 J55 J57 J58 J60 J61 J63 J64 J66 J67 J69 J70 J72 J73 J75 = SparkFun-Connectors; PROD_ID: CONN-13694
J3 J5 J8 J11 J14 J17 J20 J23 J26 J29 J32 J35 J38 J41 J44 J47 J50 J53 J56 J59 J62 J65 J68 J71 J74 U$1 U$2 U$13 U$14 U$33 U$34 U$49 U$50 U$65 U$66 U$81 U$82 U$97 U$98 U$113 U$114 U$129 U$130 U$145 U$146 U$161 U$162 U$177 U$178 U$193 U$194 U$209 U$210 U$225 U$226 U$241 U$242 U$257 U$258 U$273 U$274 U$289 U$290 U$305 U$306 U$321 U$322 U$337 U$338 U$353 U$354 U$369 U$370 U$385 U$386 = SparkX
JP1-JP6 JP8-JP13 JP15-JP20 JP22-JP27 JP29-JP34 JP36-JP41 JP43-JP48 JP50-JP55 JP57-JP62 JP64-JP69 JP71-JP76 JP78-JP83 JP85-JP90 JP92-JP97 JP99-JP104 JP106-JP111 JP113-JP118 JP120-JP125 JP127-JP132 JP134-JP139 JP141-JP146 JP148-JP153 JP155-JP160 JP162-JP167 JP169-JP174 = SparkFun
JP7 JP14 JP21 JP28 JP35 JP42 JP49 JP56 JP63 JP70 JP77 JP84 JP91 JP98 JP105 JP112 JP119 JP126 JP133 JP140 JP147 JP154 JP161 JP168 JP175 = SparkFun-Jumpers
R1 R2 R5 R6 R8 R9 R11 R12 R14 R15 R17 R18 R20 R21 R23 R24 R26 R27 R29 R30 R32 R33 R35 R36 R38 R39 R41 R42 R44 R45 R47 R48 R50 R51 R53 R54 R56 R57 R59 R60 R62 R63 R65 R66 R68 R69 R71 R72 R74 R75 = SparkFun-Resistors; PROD_ID: RES-08272
R3 R4 R7 R10 R13 R16 R19 R22 R25 R28 R31 R34 R37 R40 R43 R46 R49 R52 R55 R58 R61 R64 R67 R70 R73 = SparkFun-Resistors; PROD_ID: RES-07856
U1-U25 = SHTC3
U$3-U$6 U$10 U$15-U$27 U$35-U$43 U$51-U$59 U$67-U$75 U$83-U$91 U$99-U$107 U$115-U$123 U$131-U$139 U$147-U$155 U$163-U$171 U$179-U$187 U$195-U$203 U$211-U$219 U$227-U$235 U$243-U$251 U$259-U$267 U$275-U$283 U$291-U$299 U$307-U$315 U$323-U$331 U$339-U$347 U$355-U$363 U$371-U$379 U$387-U$395 = Labels-0_04
U$7 U$8 U$28 U$29 U$44 U$45 U$60 U$61 U$76 U$77 U$92 U$93 U$108 U$109 U$124 U$125 U$140 U$141 U$156 U$157 U$172 U$173 U$188 U$189 U$204 U$205 U$220 U$221 U$236 U$237 U$252 U$253 U$268 U$269 U$284 U$285 U$300 U$301 U$316 U$317 U$332 U$333 U$348 U$349 U$364 U$365 U$380 U$381 U$396 U$397 = buzzard_labels
U$9 U$30 U$46 U$62 U$78 U$94 U$110 U$126 U$142 U$158 U$174 U$190 U$206 U$222 U$238 U$254 U$270 U$286 U$302 U$318 U$334 U$350 U$366 U$382 U$398 = Labels

## Nets
3.3V: C1.1 J2.2 J3.2 J4.2 JP7.2 R3.2 U1.1
3.3V1: C2.1 J1.2 J5.2 J6.2 JP14.2 R4.2 U2.1
3.3V2: C3.1 J7.2 J8.2 J9.2 JP21.2 R7.2 U3.1
3.3V3: C4.1 J10.2 J11.2 J12.2 JP28.2 R10.2 U4.1
3.3V4: C5.1 J13.2 J14.2 J15.2 JP35.2 R13.2 U5.1
3.3V5: C6.1 J16.2 J17.2 J18.2 JP42.2 R16.2 U6.1
3.3V6: C7.1 J19.2 J20.2 J21.2 JP49.2 R19.2 U7.1
3.3V7: C8.1 J22.2 J23.2 J24.2 JP56.2 R22.2 U8.1
3.3V8: C9.1 J25.2 J26.2 J27.2 JP63.2 R25.2 U9.1
3.3V9: C10.1 J28.2 J29.2 J30.2 JP70.2 R28.2 U10.1
3.3V10: C11.1 J31.2 J32.2 J33.2 JP77.2 R31.2 U11.1
3.3V11: C12.1 J34.2 J35.2 J36.2 JP84.2 R34.2 U12.1
3.3V12: C13.1 J37.2 J38.2 J39.2 JP91.2 R37.2 U13.1
3.3V13: C14.1 J40.2 J41.2 J42.2 JP98.2 R40.2 U14.1
3.3V14: C15.1 J43.2 J44.2 J45.2 JP105.2 R43.2 U15.1
3.3V15: C16.1 J46.2 J47.2 J48.2 JP112.2 R46.2 U16.1
3.3V16: C17.1 J49.2 J50.2 J51.2 JP119.2 R49.2 U17.1
3.3V17: C18.1 J52.2 J53.2 J54.2 JP126.2 R52.2 U18.1
3.3V18: C19.1 J55.2 J56.2 J57.2 JP133.2 R55.2 U19.1
3.3V19: C20.1 J58.2 J59.2 J60.2 JP140.2 R58.2 U20.1
3.3V20: C21.1 J61.2 J62.2 J63.2 JP147.2 R61.2 U21.1
3.3V21: C22.1 J64.2 J65.2 J66.2 JP154.2 R64.2 U22.1
3.3V22: C23.1 J67.2 J68.2 J69.2 JP161.2 R67.2 U23.1
3.3V23: C24.1 J70.2 J71.2 J72.2 JP168.2 R70.2 U24.1
3.3V24: C25.1 J73.2 J74.2 J75.2 JP175.2 R73.2 U25.1
GND: C1.2 D1.C J2.1 J3.1 J4.1 U1.4 U1.5
GND1: C2.2 D2.C J1.1 J5.1 J6.1 U2.4 U2.5
GND2: C3.2 D3.C J7.1 J8.1 J9.1 U3.4 U3.5
GND3: C4.2 D4.C J10.1 J11.1 J12.1 U4.4 U4.5
GND4: C5.2 D5.C J13.1 J14.1 J15.1 U5.4 U5.5
GND5: C6.2 D6.C J16.1 J17.1 J18.1 U6.4 U6.5
GND6: C7.2 D7.C J19.1 J20.1 J21.1 U7.4 U7.5
GND7: C8.2 D8.C J22.1 J23.1 J24.1 U8.4 U8.5
GND8: C9.2 D9.C J25.1 J26.1 J27.1 U9.4 U9.5
GND9: C10.2 D10.C J28.1 J29.1 J30.1 U10.4 U10.5
GND10: C11.2 D11.C J31.1 J32.1 J33.1 U11.4 U11.5
GND11: C12.2 D12.C J34.1 J35.1 J36.1 U12.4 U12.5
GND12: C13.2 D13.C J37.1 J38.1 J39.1 U13.4 U13.5
GND13: C14.2 D14.C J40.1 J41.1 J42.1 U14.4 U14.5
GND14: C15.2 D15.C J43.1 J44.1 J45.1 U15.4 U15.5
GND15: C16.2 D16.C J46.1 J47.1 J48.1 U16.4 U16.5
GND16: C17.2 D17.C J49.1 J50.1 J51.1 U17.4 U17.5
GND17: C18.2 D18.C J52.1 J53.1 J54.1 U18.4 U18.5
GND18: C19.2 D19.C J55.1 J56.1 J57.1 U19.4 U19.5
GND19: C20.2 D20.C J58.1 J59.1 J60.1 U20.4 U20.5
GND20: C21.2 D21.C J61.1 J62.1 J63.1 U21.4 U21.5
GND21: C22.2 D22.C J64.1 J65.1 J66.1 U22.4 U22.5
GND22: C23.2 D23.C J67.1 J68.1 J69.1 U23.4 U23.5
GND23: C24.2 D24.C J70.1 J71.1 J72.1 U24.4 U24.5
GND24: C25.2 D25.C J73.1 J74.1 J75.1 U25.4 U25.5
N$1: JP7.3 R1.2
N$2: JP7.1 R2.2
N$3: D1.A R3.1
N$4: D2.A R4.1
N$5: JP14.3 R5.2
N$6: JP14.1 R6.2
N$7: D3.A R7.1
N$8: JP21.3 R8.2
N$9: JP21.1 R9.2
N$10: D4.A R10.1
N$11: JP28.3 R11.2
N$12: JP28.1 R12.2
N$13: D5.A R13.1
N$14: JP35.3 R14.2
N$15: JP35.1 R15.2
N$16: D6.A R16.1
N$17: JP42.3 R17.2
N$18: JP42.1 R18.2
N$19: D7.A R19.1
N$20: JP49.3 R20.2
N$21: JP49.1 R21.2
N$22: D8.A R22.1
N$23: JP56.3 R23.2
N$24: JP56.1 R24.2
N$25: D9.A R25.1
N$26: JP63.3 R26.2
N$27: JP63.1 R27.2
N$28: D10.A R28.1
N$29: JP70.3 R29.2
N$30: JP70.1 R30.2
N$31: D11.A R31.1
N$32: JP77.3 R32.2
N$33: JP77.1 R33.2
N$34: D12.A R34.1
N$35: JP84.3 R35.2
N$36: JP84.1 R36.2
N$37: D13.A R37.1
N$38: JP91.3 R38.2
N$39: JP91.1 R39.2
N$40: D14.A R40.1
N$41: JP98.3 R41.2
N$42: JP98.1 R42.2
N$43: D15.A R43.1
N$44: JP105.3 R44.2
N$45: JP105.1 R45.2
N$46: D16.A R46.1
N$47: JP112.3 R47.2
N$48: JP112.1 R48.2
N$49: D17.A R49.1
N$50: JP119.3 R50.2
N$51: JP119.1 R51.2
N$52: D18.A R52.1
N$53: JP126.3 R53.2
N$54: JP126.1 R54.2
N$55: D19.A R55.1
N$56: JP133.3 R56.2
N$57: JP133.1 R57.2
N$58: D20.A R58.1
N$59: JP140.3 R59.2
N$60: JP140.1 R60.2
N$61: D21.A R61.1
N$62: JP147.3 R62.2
N$63: JP147.1 R63.2
N$64: D22.A R64.1
N$65: JP154.3 R65.2
N$66: JP154.1 R66.2
N$67: D23.A R67.1
N$68: JP161.3 R68.2
N$69: JP161.1 R69.2
N$70: D24.A R70.1
N$71: JP168.3 R71.2
N$72: JP168.1 R72.2
N$73: D25.A R73.1
N$74: JP175.3 R74.2
N$75: JP175.1 R75.2
SCL: J2.4 J3.4 J4.4 R1.1 U1.2
SCL1: J1.4 J5.4 J6.4 R5.1 U2.2
SCL2: J7.4 J8.4 J9.4 R8.1 U3.2
SCL3: J10.4 J11.4 J12.4 R11.1 U4.2
SCL4: J13.4 J14.4 J15.4 R14.1 U5.2
SCL5: J16.4 J17.4 J18.4 R17.1 U6.2
SCL6: J19.4 J20.4 J21.4 R20.1 U7.2
SCL7: J22.4 J23.4 J24.4 R23.1 U8.2
SCL8: J25.4 J26.4 J27.4 R26.1 U9.2
SCL9: J28.4 J29.4 J30.4 R29.1 U10.2
SCL10: J31.4 J32.4 J33.4 R32.1 U11.2
SCL11: J34.4 J35.4 J36.4 R35.1 U12.2
SCL12: J37.4 J38.4 J39.4 R38.1 U13.2
SCL13: J40.4 J41.4 J42.4 R41.1 U14.2
SCL14: J43.4 J44.4 J45.4 R44.1 U15.2
SCL15: J46.4 J47.4 J48.4 R47.1 U16.2
SCL16: J49.4 J50.4 J51.4 R50.1 U17.2
SCL17: J52.4 J53.4 J54.4 R53.1 U18.2
SCL18: J55.4 J56.4 J57.4 R56.1 U19.2
SCL19: J58.4 J59.4 J60.4 R59.1 U20.2
SCL20: J61.4 J62.4 J63.4 R62.1 U21.2
SCL21: J64.4 J65.4 J66.4 R65.1 U22.2
SCL22: J67.4 J68.4 J69.4 R68.1 U23.2
SCL23: J70.4 J71.4 J72.4 R71.1 U24.2
SCL24: J73.4 J74.4 J75.4 R74.1 U25.2
SDA: J2.3 J3.3 J4.3 R2.1 U1.3
SDA1: J1.3 J5.3 J6.3 R6.1 U2.3
SDA2: J7.3 J8.3 J9.3 R9.1 U3.3
SDA3: J10.3 J11.3 J12.3 R12.1 U4.3
SDA4: J13.3 J14.3 J15.3 R15.1 U5.3
SDA5: J16.3 J17.3 J18.3 R18.1 U6.3
SDA6: J19.3 J20.3 J21.3 R21.1 U7.3
SDA7: J22.3 J23.3 J24.3 R24.1 U8.3
SDA8: J25.3 J26.3 J27.3 R27.1 U9.3
SDA9: J28.3 J29.3 J30.3 R30.1 U10.3
SDA10: J31.3 J32.3 J33.3 R33.1 U11.3
SDA11: J34.3 J35.3 J36.3 R36.1 U12.3
SDA12: J37.3 J38.3 J39.3 R39.1 U13.3
SDA13: J40.3 J41.3 J42.3 R42.1 U14.3
SDA14: J43.3 J44.3 J45.3 R45.1 U15.3
SDA15: J46.3 J47.3 J48.3 R48.1 U16.3
SDA16: J49.3 J50.3 J51.3 R51.1 U17.3
SDA17: J52.3 J53.3 J54.3 R54.1 U18.3
SDA18: J55.3 J56.3 J57.3 R57.1 U19.3
SDA19: J58.3 J59.3 J60.3 R60.1 U20.3
SDA20: J61.3 J62.3 J63.3 R63.1 U21.3
SDA21: J64.3 J65.3 J66.3 R66.1 U22.3
SDA22: J67.3 J68.3 J69.3 R69.1 U23.3
SDA23: J70.3 J71.3 J72.3 R72.1 U24.3
SDA24: J73.3 J74.3 J75.3 R75.1 U25.3